# Altium PCB HU_revB.PcbDoc (part 1 of 5)
Units mm, origin at the board's own origin, x right, y up, seen from the top; angles counter-clockwise.
Board outline 164 x 90 mm, 6 copper layers (TOP, GND1, INT SIG, PWR + INT SIG, GND2, BOT), stack 1.538 mm thick; 404 components, 380 nets, 1687 pads, 328 vias.
Unrouted connection lines stored in the file: 342.
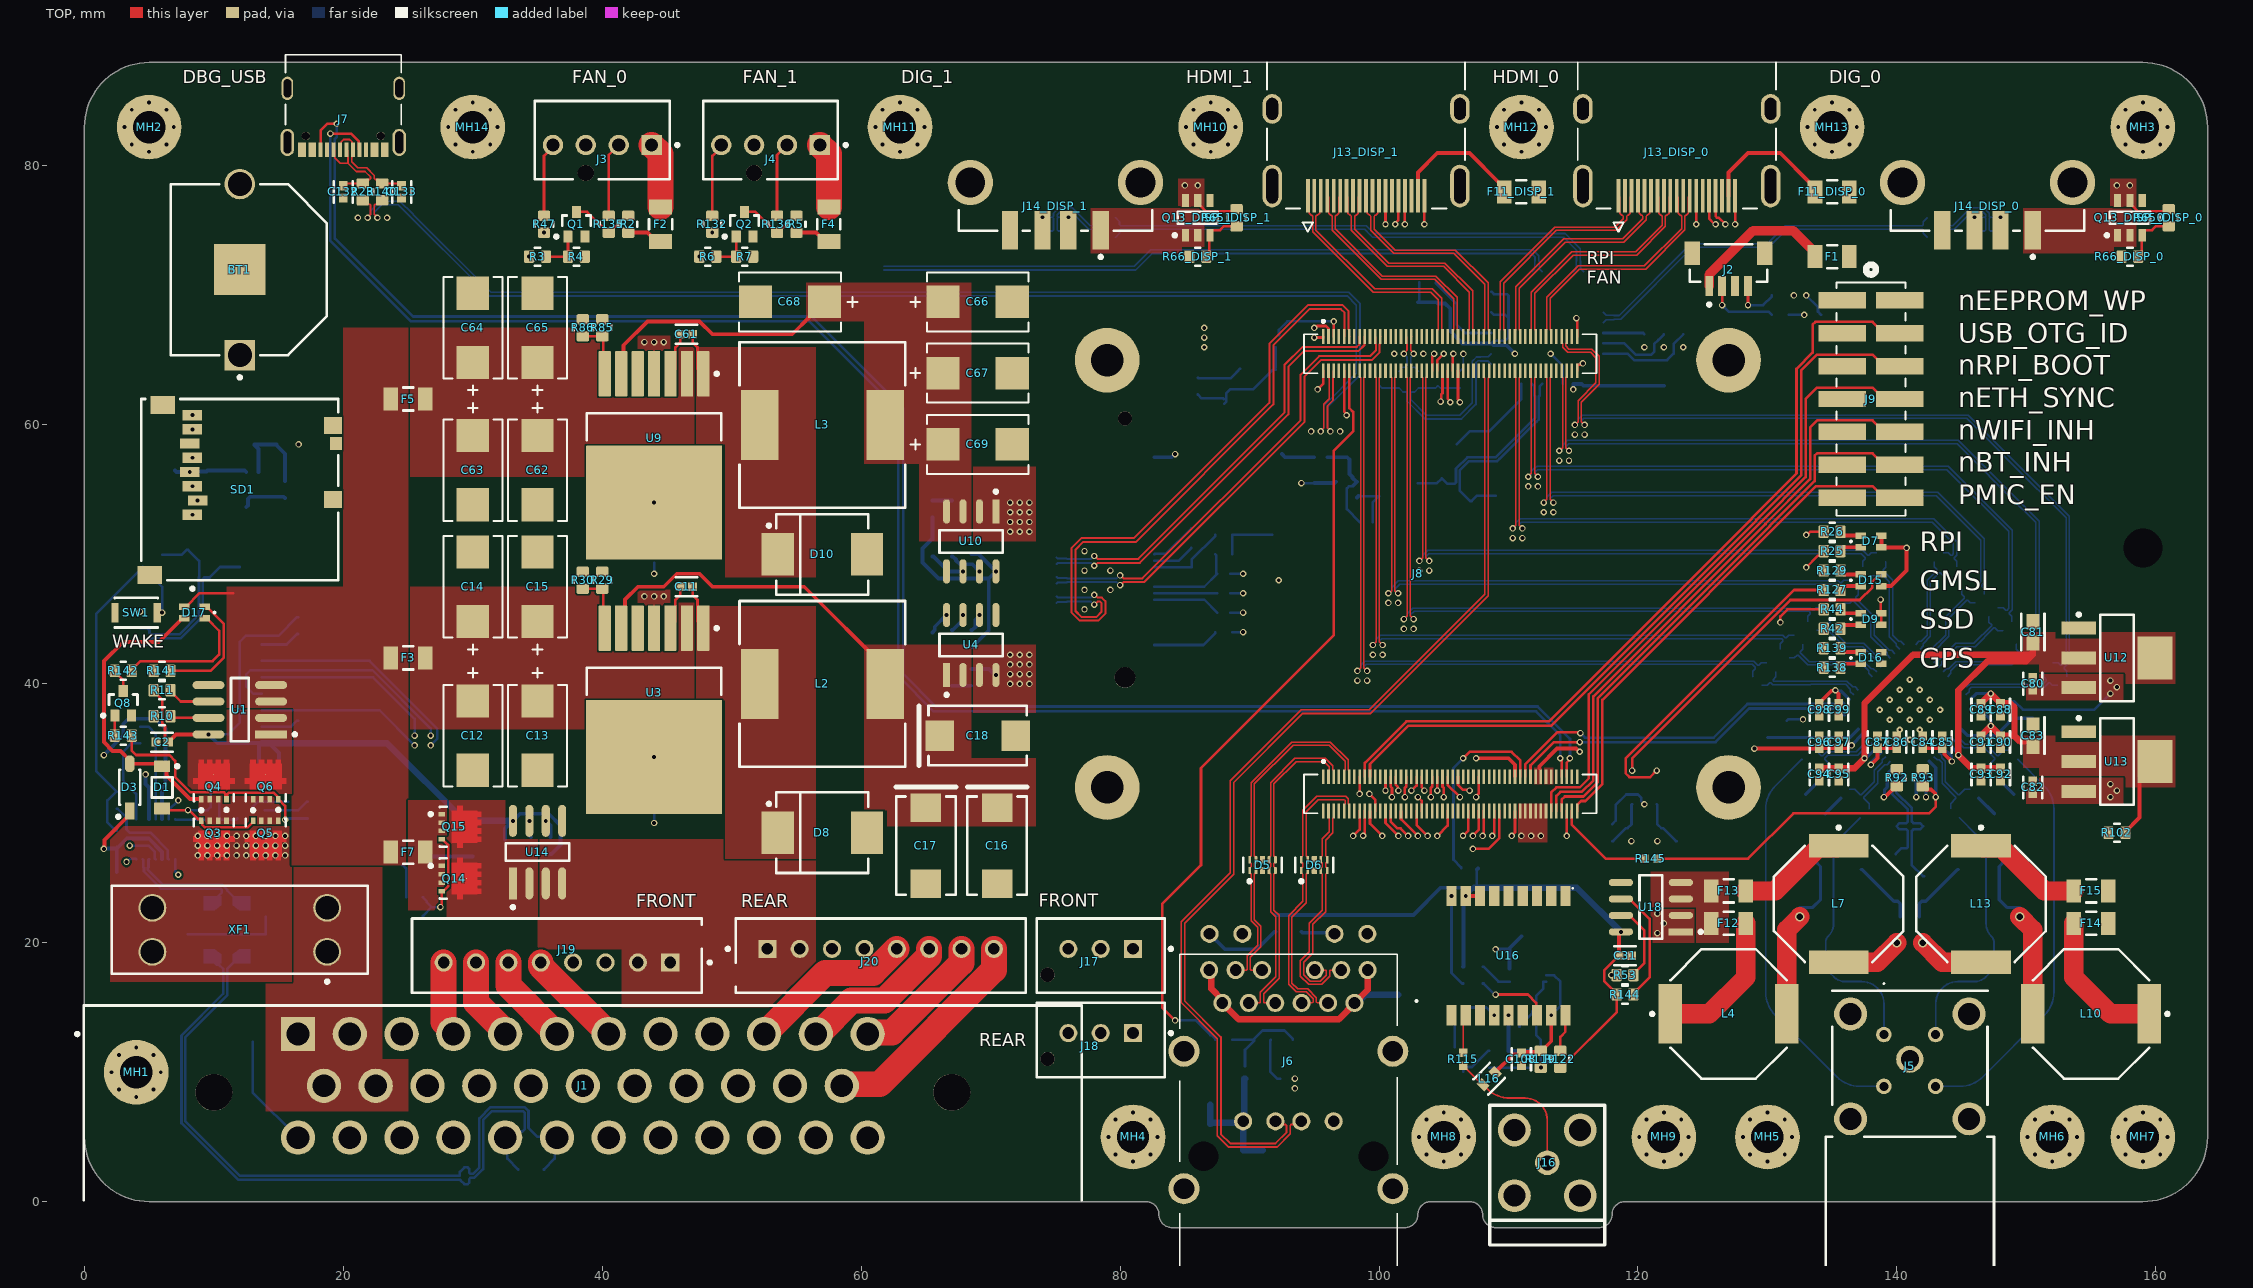
[diagram p0: TOP view]
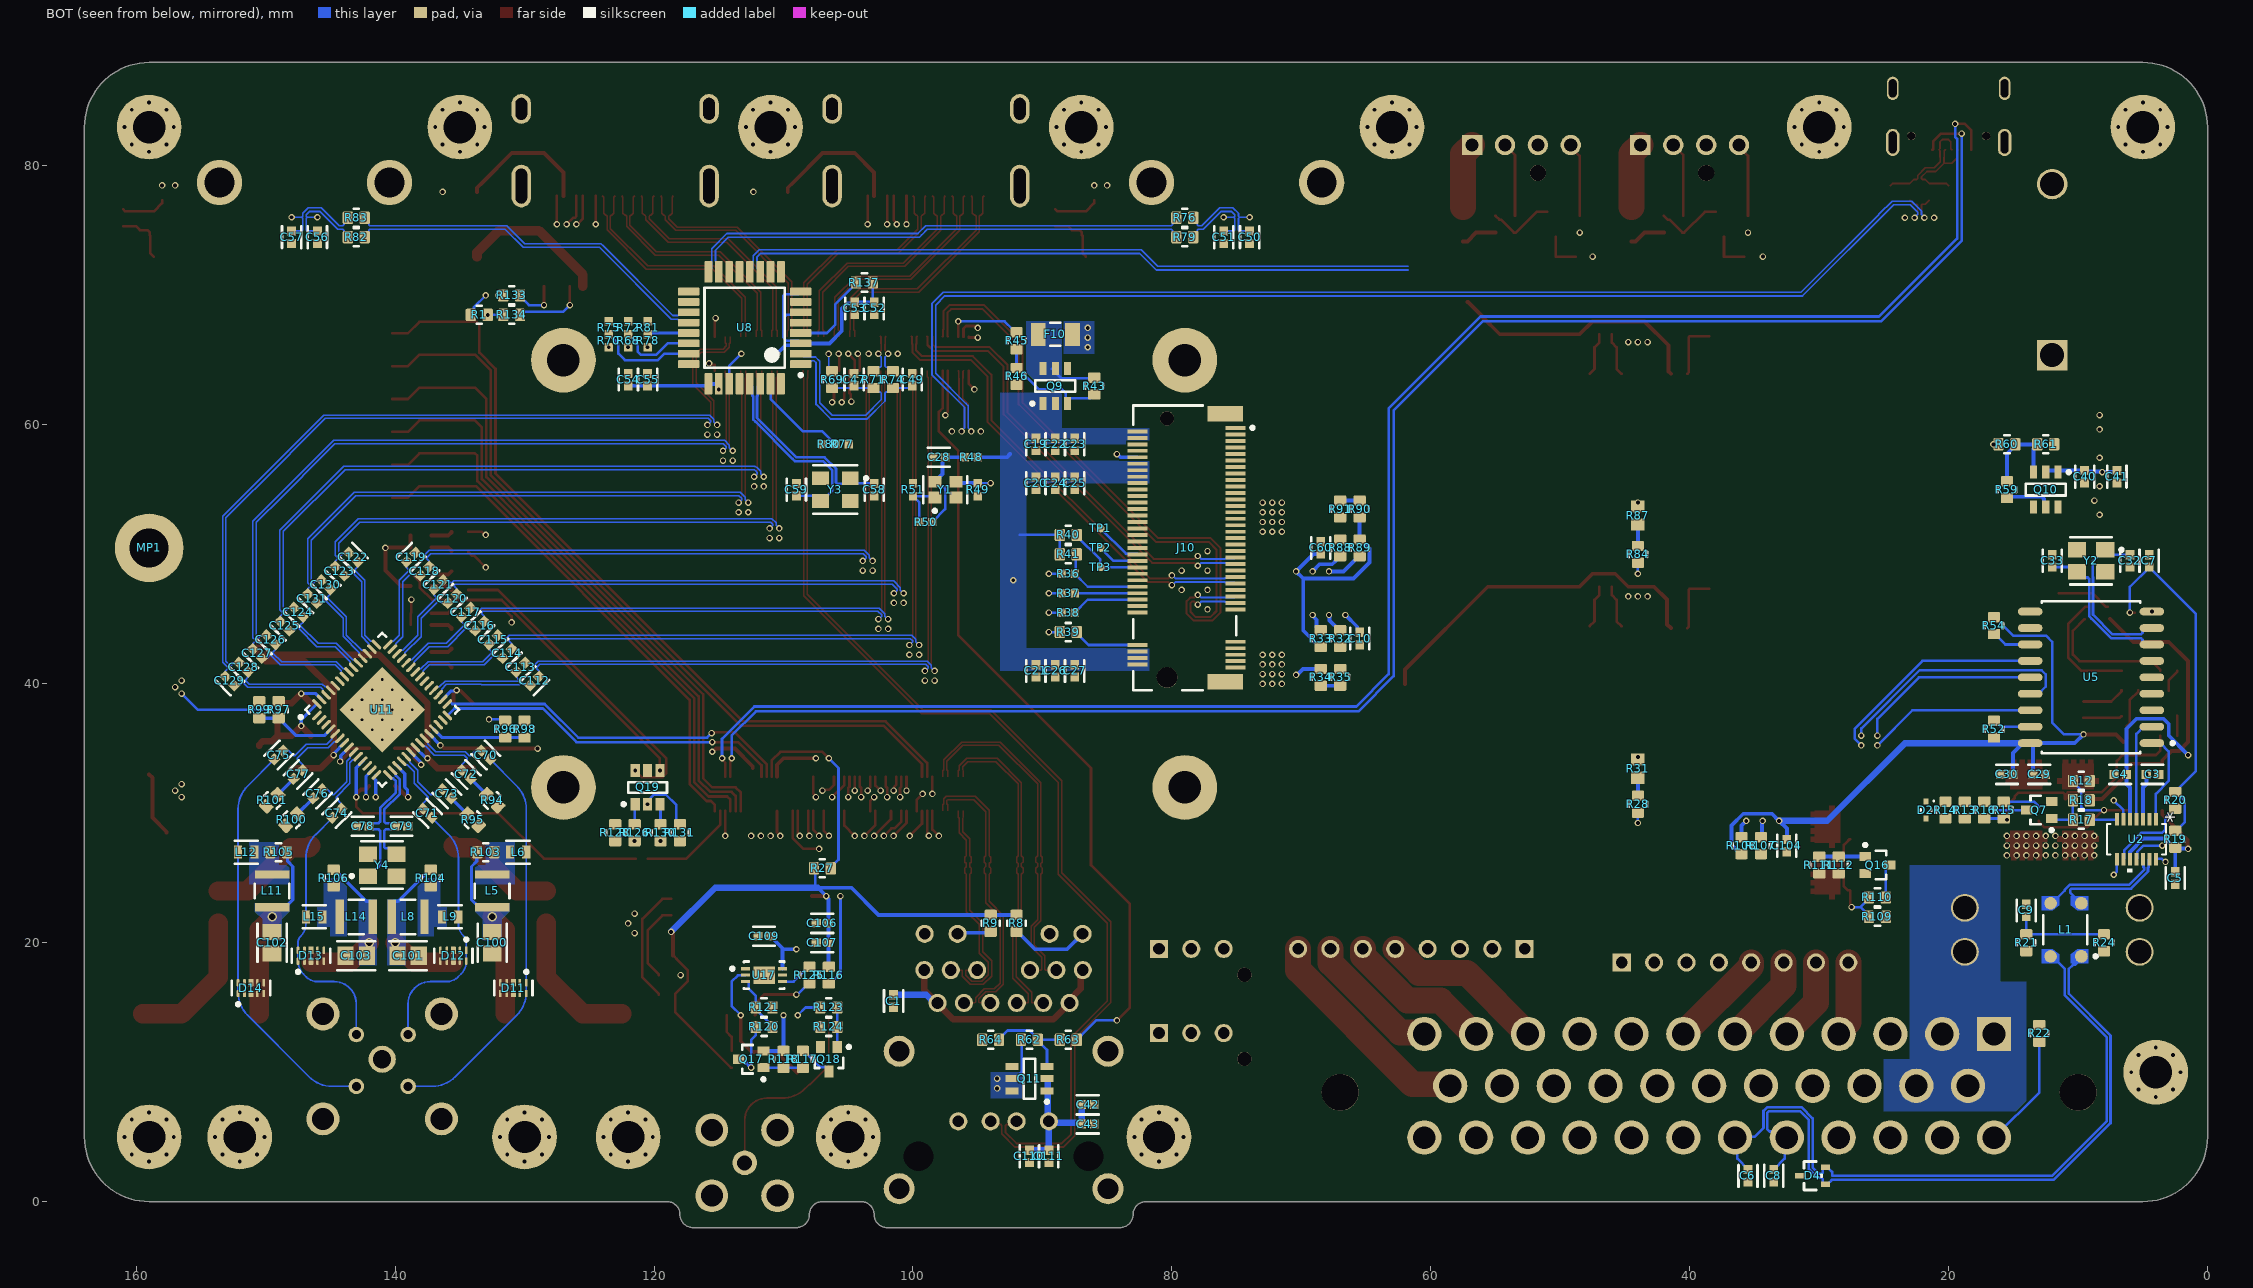
[diagram p1: BOT view, seen from below]
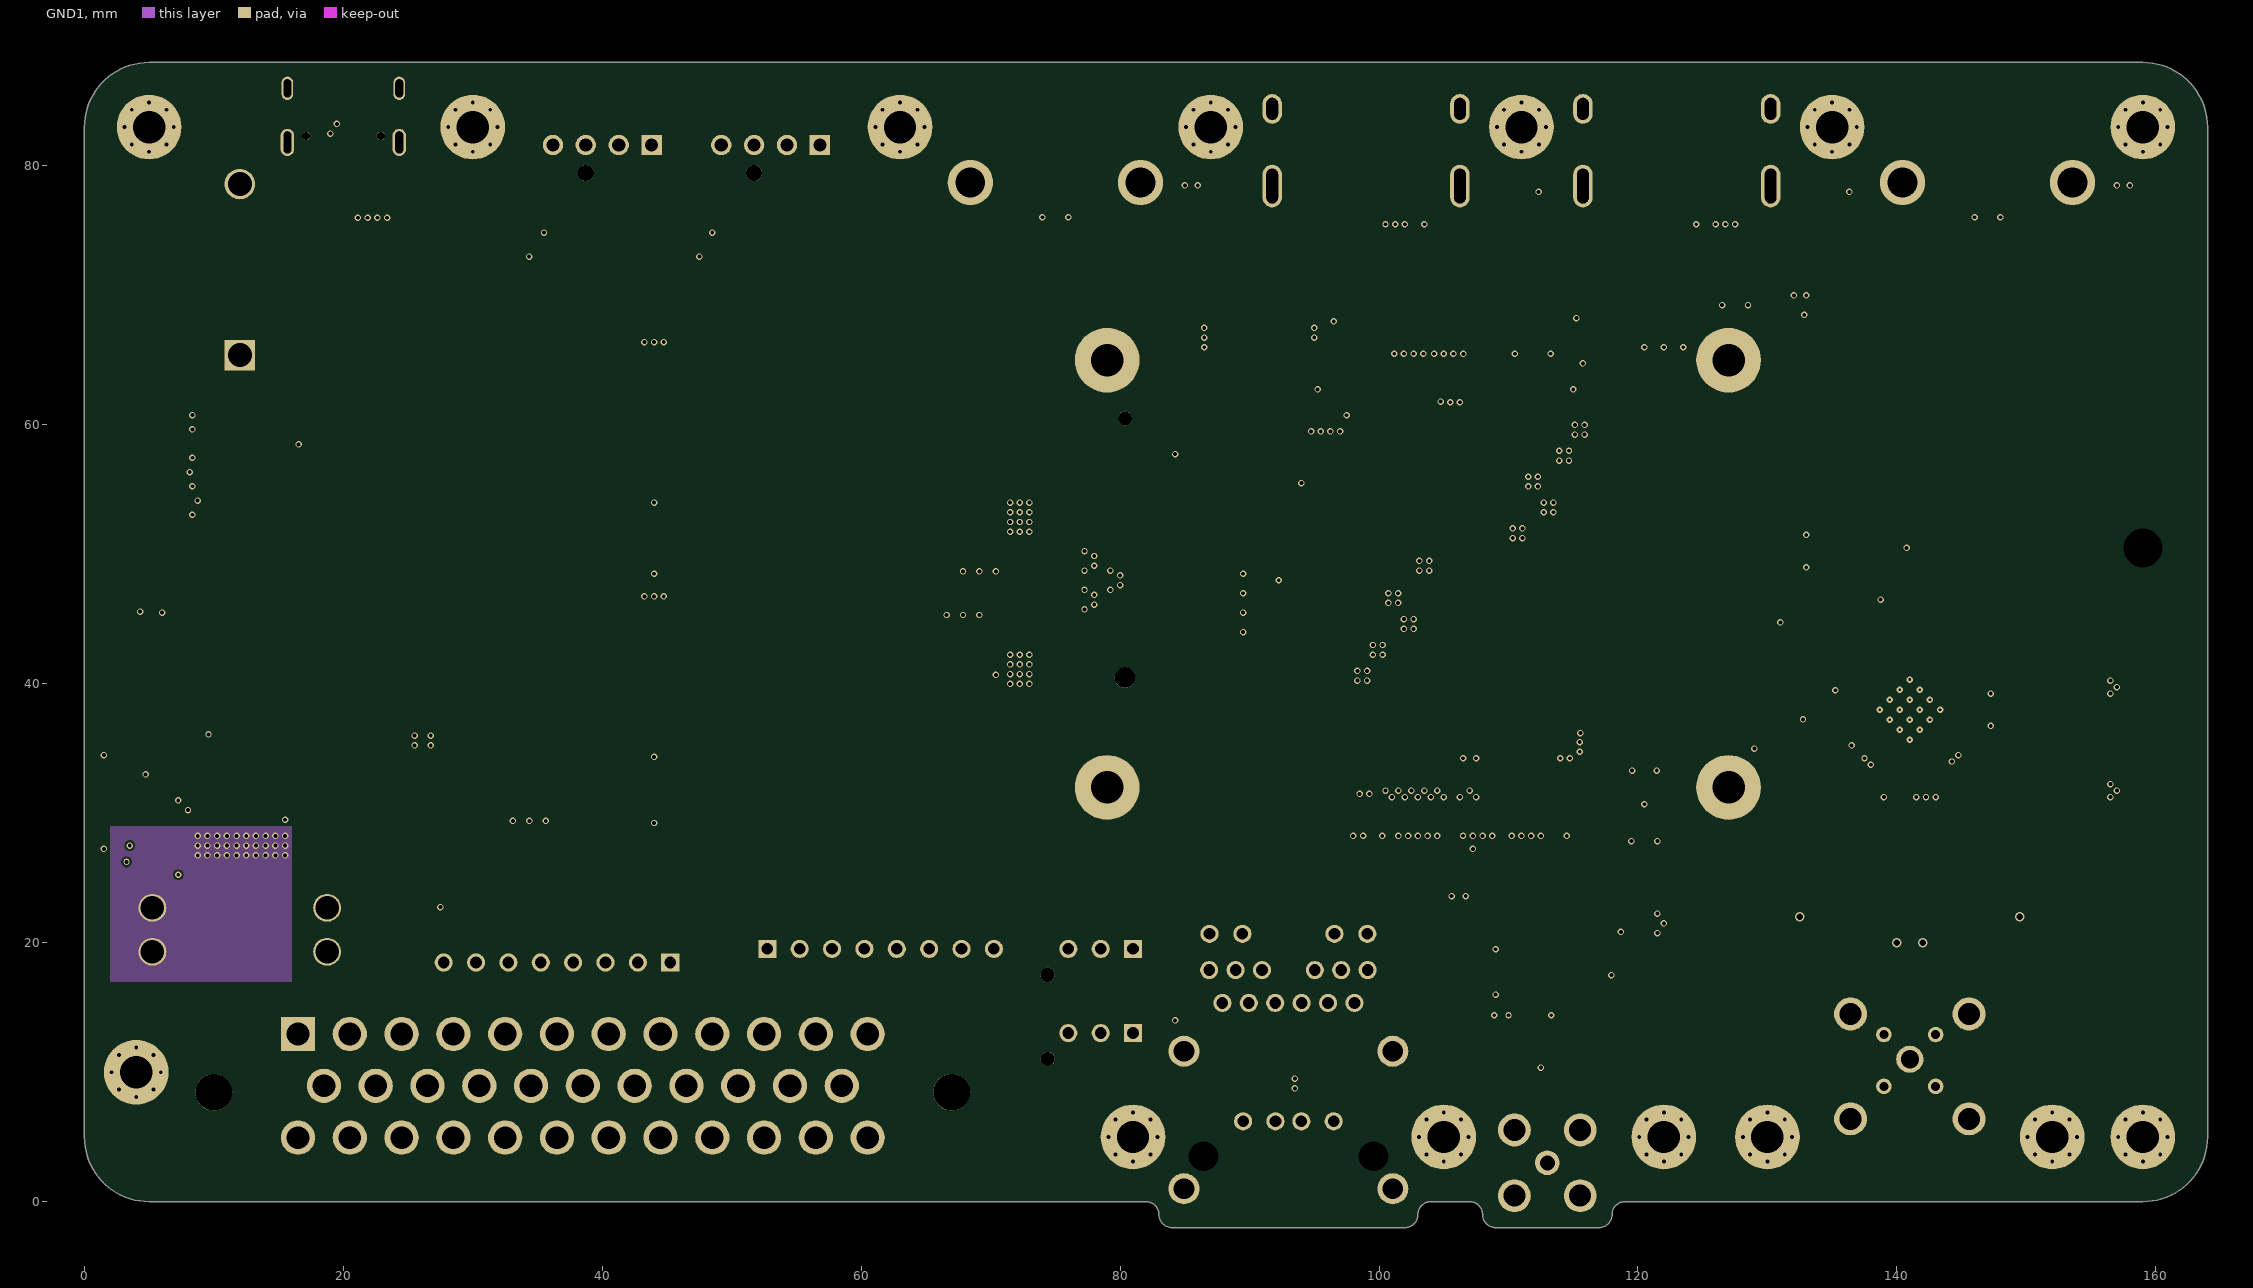
[diagram p2: GND1]
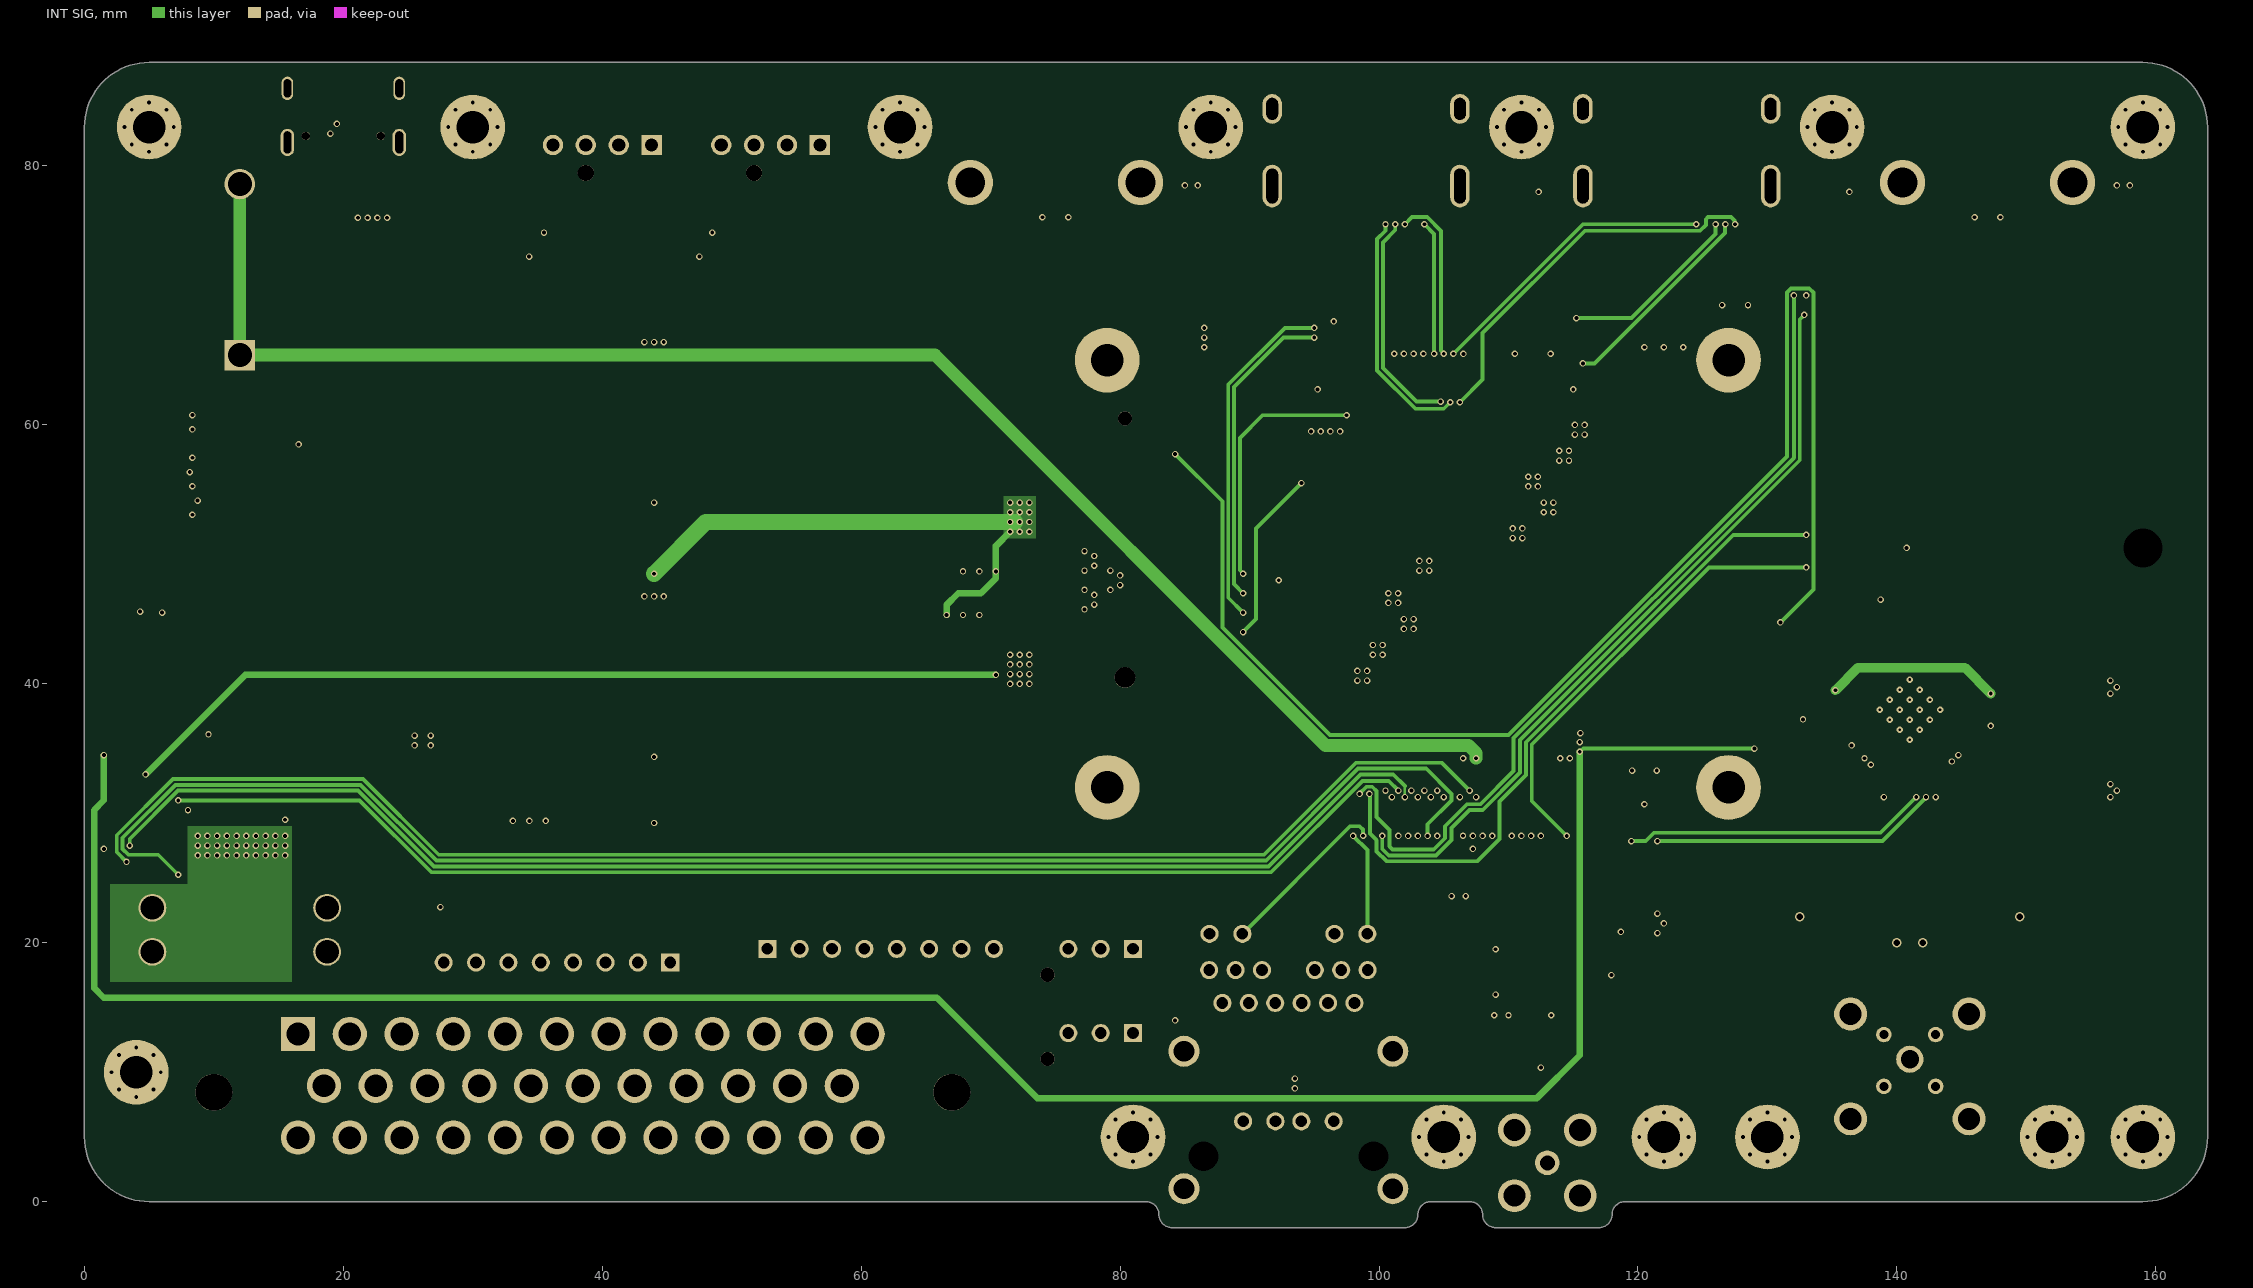
[diagram p3: INT SIG]
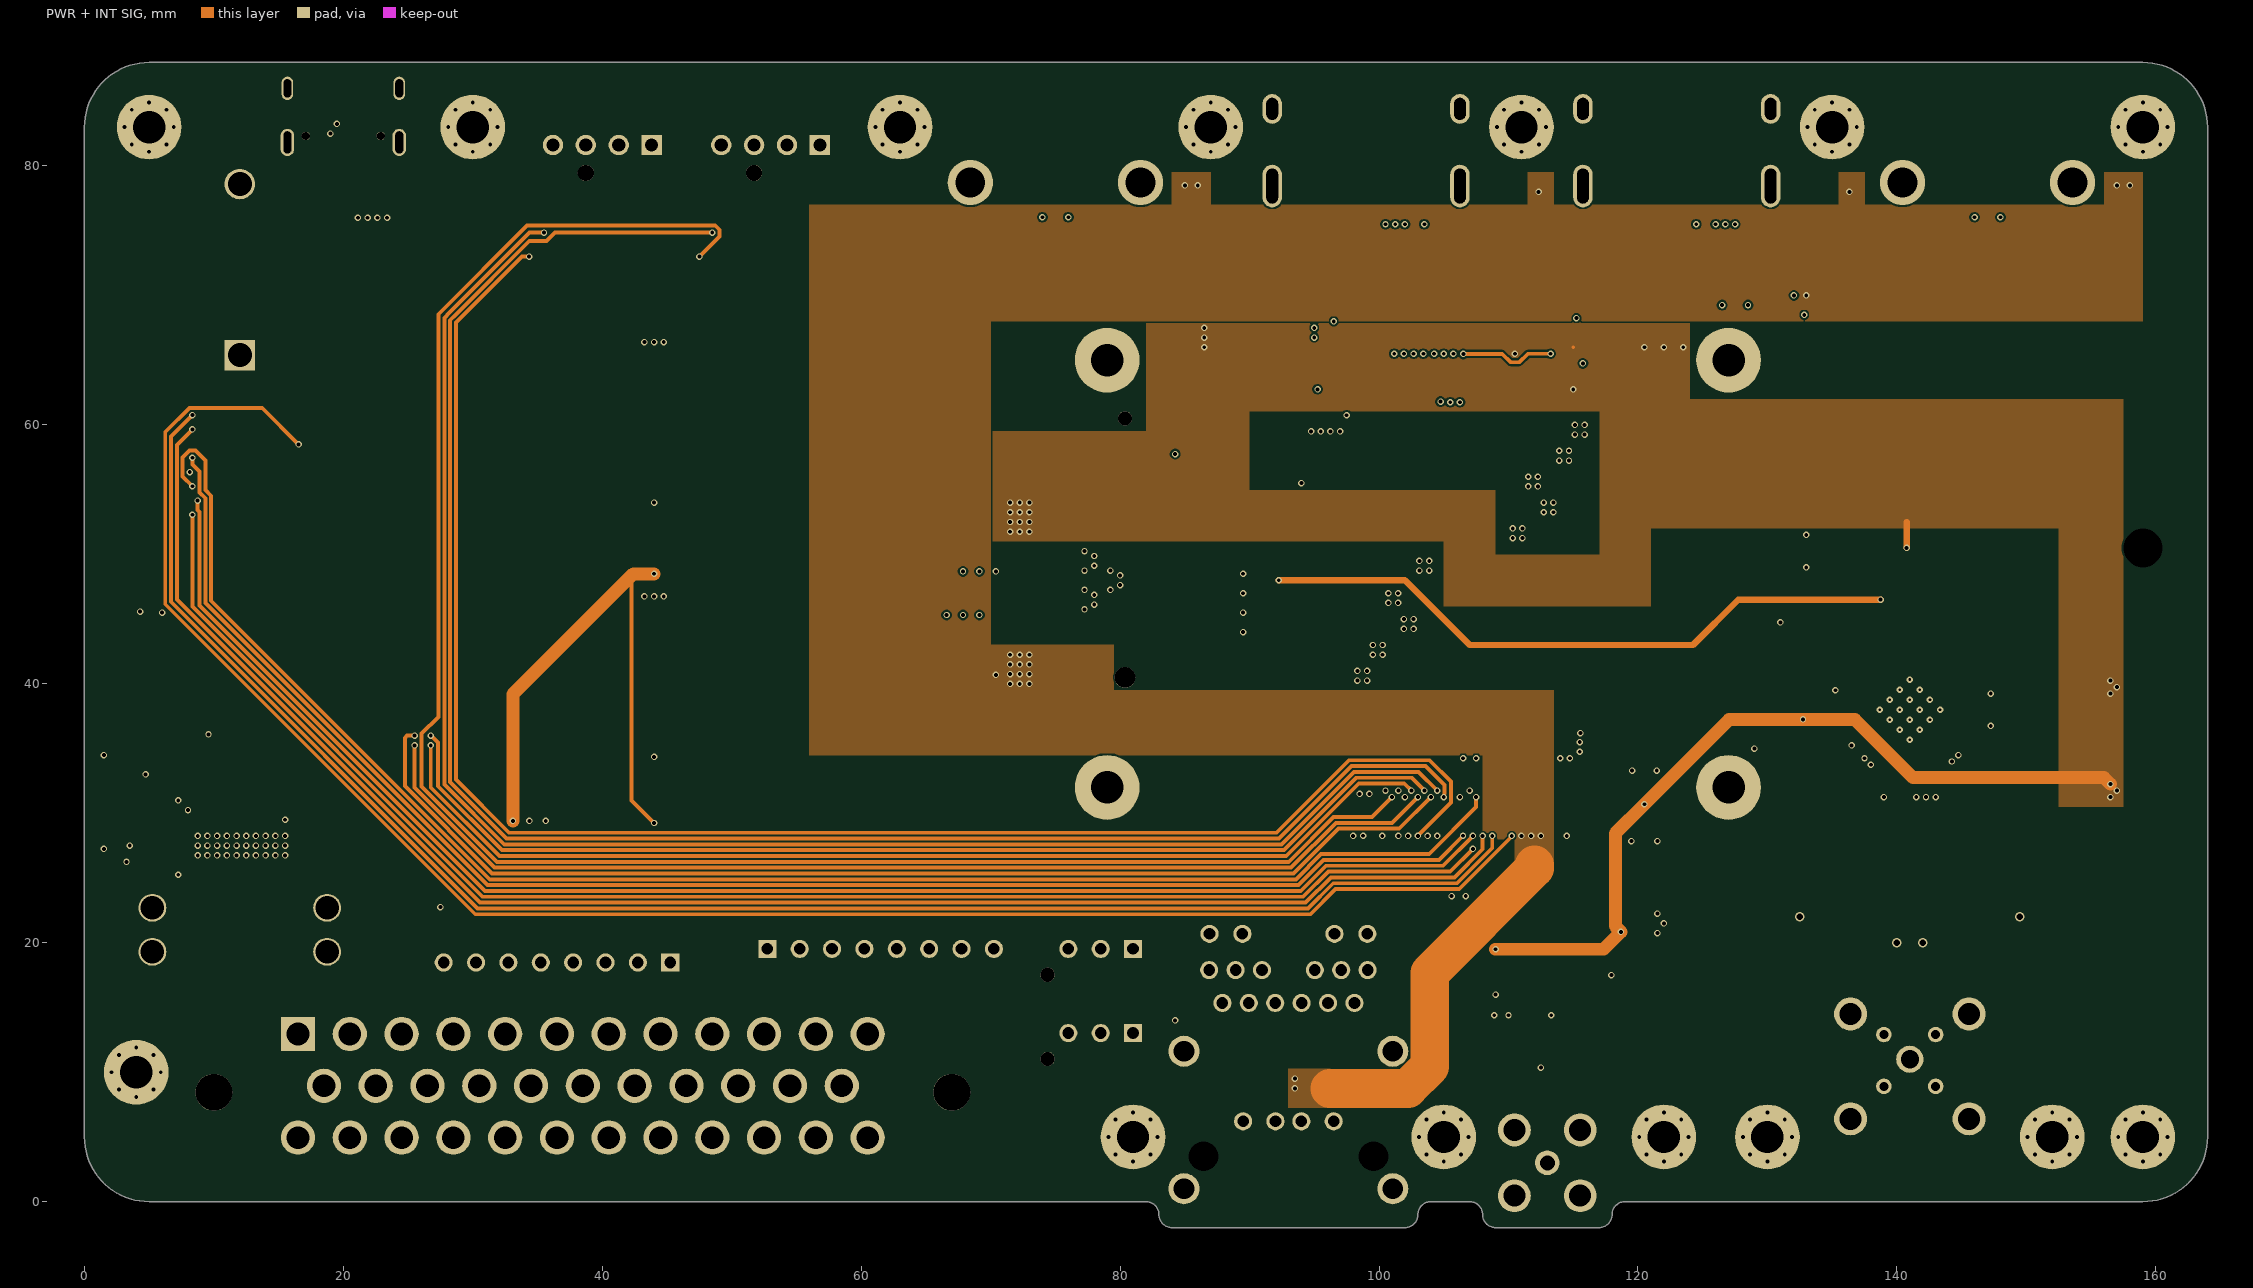
[diagram p4: PWR + INT SIG]
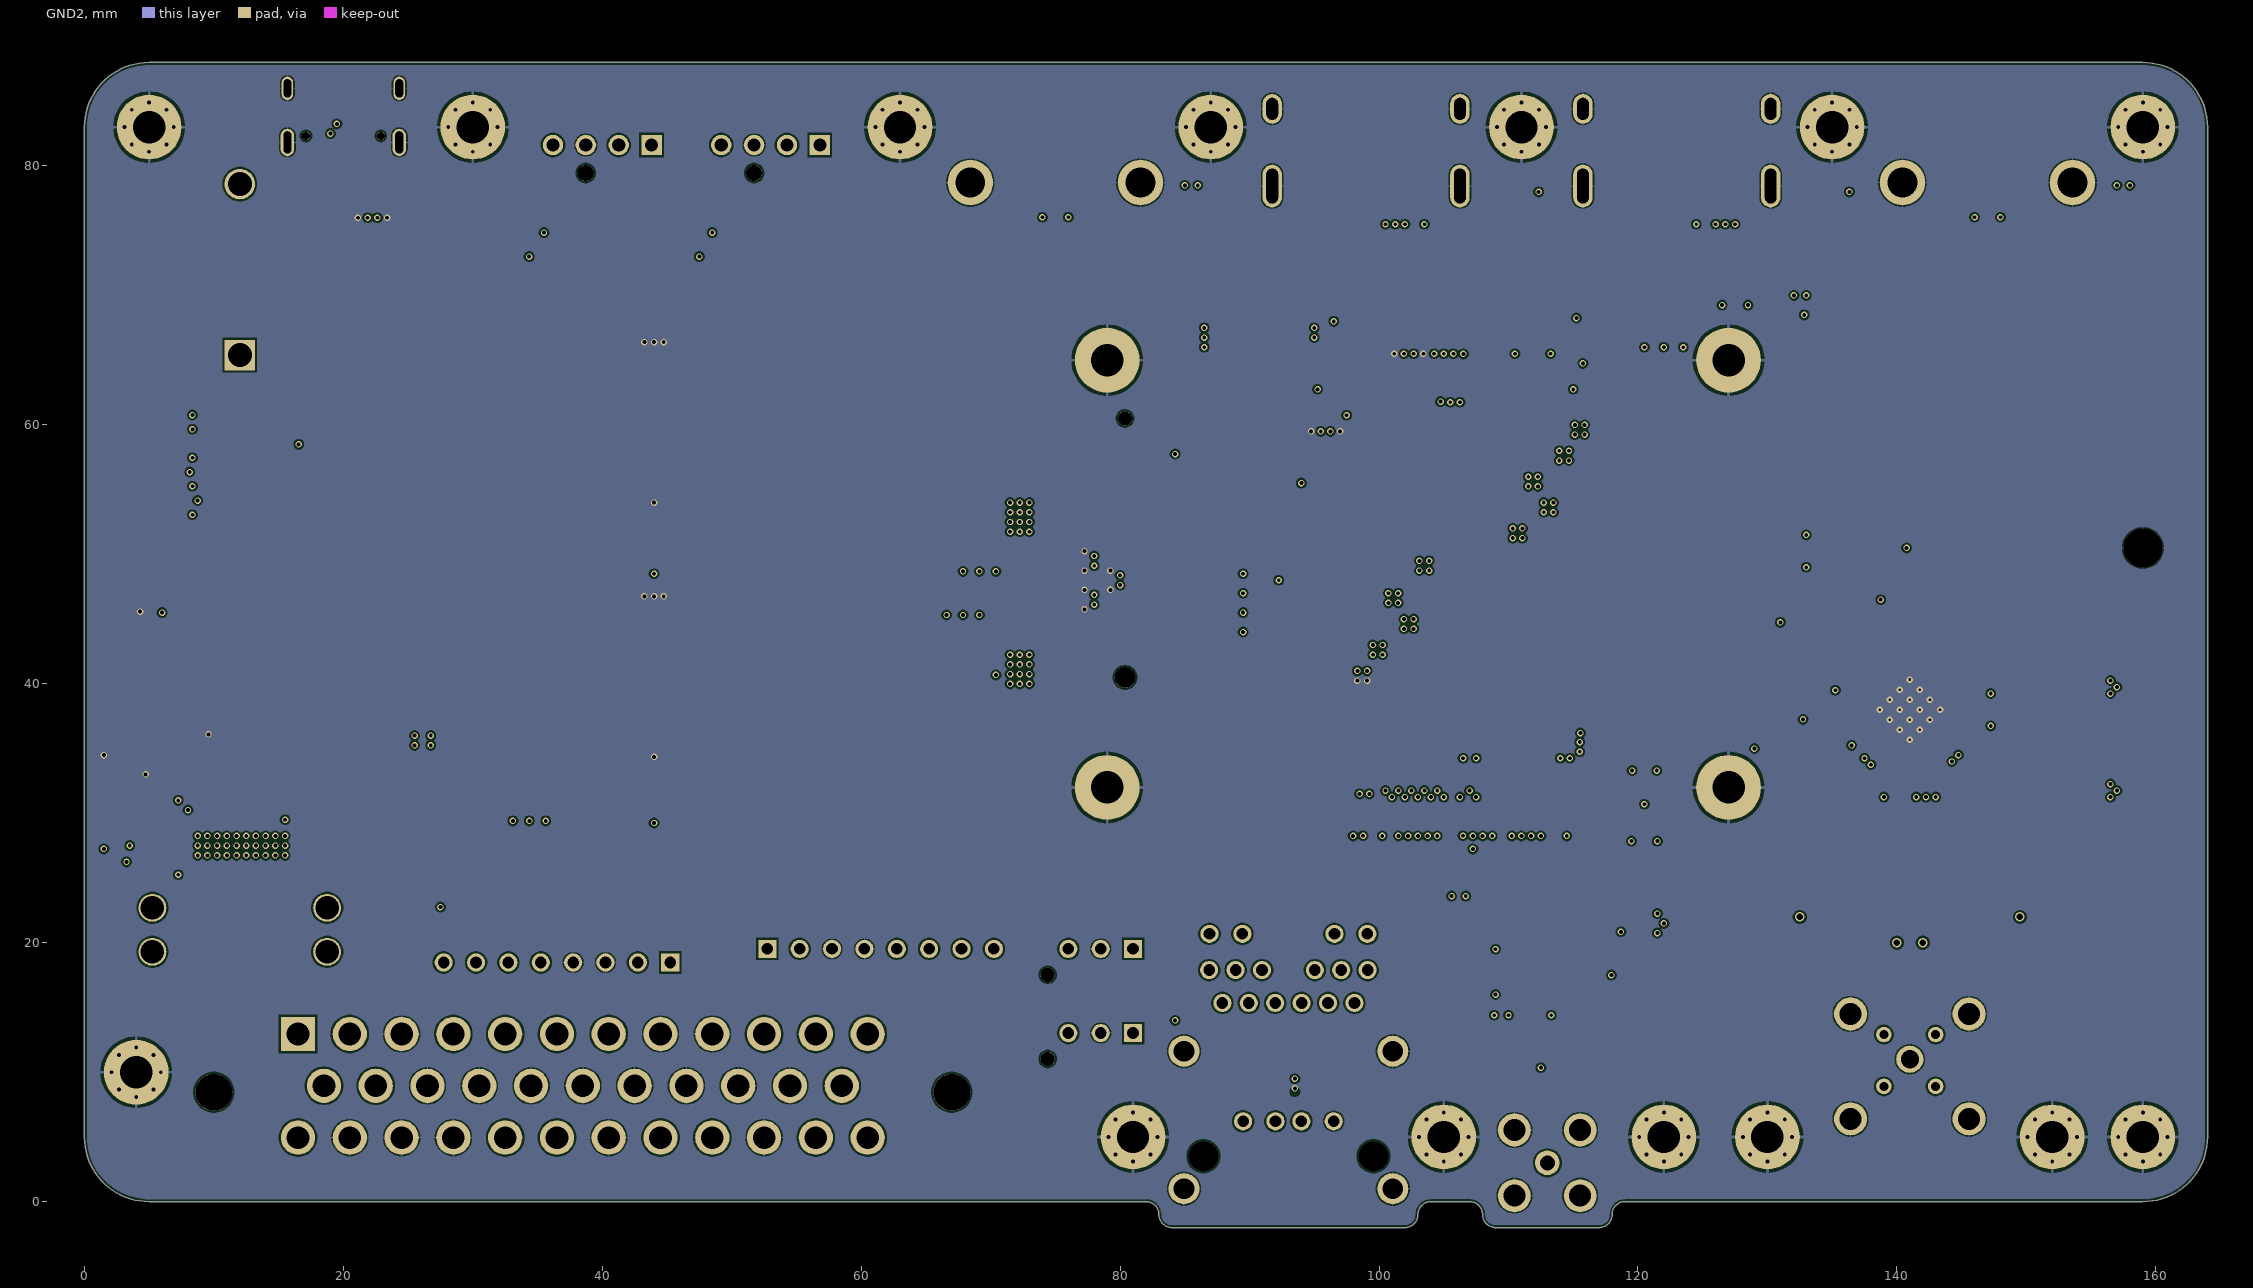
[diagram p5: GND2]

## Layer stack, top to bottom
Top Solder: solder mask 0.0127, Solder Resist, Dk 3.8
TOP: signal copper 0.035
Dielectric 1: prepreg 0.0994, 2313, Dk 4.05
GND1: signal copper 0.0152
Core 1: core 0.55, FR-4, Dk 4.5
INT SIG: signal copper 0.0152
Dielectric 2: prepreg 0.1088, 2116, Dk 4.25
PWR + INT SIG: signal copper 0.0152
Core 2: core 0.55, FR-4, Dk 4.5
GND2: signal copper 0.0152
Dielectric 3: prepreg 0.0994, 2313, Dk 4.05
BOT: signal copper 0.035
Bottom Solder: solder mask 0.0127, Solder Resist, Dk 3.8

## Board outline
83,-1 ccw(c84,-1) 84,-2 102,-2 ccw(c102,-1) 103,-1 cw(c104,-1) 104,0 107,0 cw(c107,-1) 108,-1 ccw(c109,-1) 109,-2 117,-2 ccw(c117,-1) 118,-1 cw(c119,-1) 119,0 159,0 ccw(c159,5) 164,5 164,83 ccw(c159,83) 159,88 5,88 ccw(c5,83) 0,83 0,5 ccw(c5,5) 5,0 82,0 cw(c82,-1)

## Design rules (kind name [scope] priority, off if disabled: settings)
BoardOutlineClearance [All] p1: gap=0.2 ignorepadtopadclearanceinfootprint=FALSE
Clearance [All] p1: gap=0.15 ignorepadtopadclearanceinfootprint=FALSE
ComponentClearance [All] p1: gap=0.102 collisioncheckmode=3 verticalgap=0.102 showdistances=TRUE
DiffPairsRouting 90DIFF [InDifferentialPairClass('90DIFF')] p1: maxlimit=0.15 minlimit=0.127 mostfreqgap=0.127 toplayer_mingap=0.15 toplayer_prefgap=0.15 toplayer_minwidth=0.135 toplayer_maxwidth=0.135 toplayer_prefwidth=0.135 midlayer1_maxgap=0.127 midlayer1_minwidth=0.104 midlayer1_maxwidth=0.104 midlayer1_prefwidth=0.104 midlayer2_maxgap=0.127 midlayer2_minwidth=0.105 midlayer2_maxwidth=0.105 midlayer2_prefwidth=0.105 midlayer3_maxgap=0.127 midlayer3_minwidth=0.105 midlayer3_maxwidth=0.105 midlayer3_prefwidth=0.105 midlayer4_maxgap=0.127 midlayer4_minwidth=0.104 midlayer4_maxwidth=0.104 midlayer4_prefwidth=0.104 bottomlayer_mingap=0.15 bottomlayer_prefgap=0.15 bottomlayer_minwidth=0.135 bottomlayer_maxwidth=0.135 bottomlayer_prefwidth=0.135 impedanceprofiledriven=TRUE impedanceprofileid={E2B21E95-53F9-44AF-B5D0-3A7C9C726F64} impedanceprofilevalue=90.000000 maxuncoupledlength=12.7
DiffPairsRouting 100DIFF [InDifferentialPairClass('100DIFF')] p2: maxlimit=0.15 minlimit=0.127 mostfreqgap=0.127 toplayer_mingap=0.15 toplayer_prefgap=0.15 toplayer_minwidth=0.103 toplayer_maxwidth=0.103 toplayer_prefwidth=0.103 midlayer1_maxgap=0.127 midlayer1_minwidth=0.078 midlayer1_maxwidth=0.078 midlayer1_prefwidth=0.078 midlayer2_maxgap=0.127 midlayer2_minwidth=0.078 midlayer2_maxwidth=0.078 midlayer2_prefwidth=0.078 midlayer3_maxgap=0.127 midlayer3_minwidth=0.078 midlayer3_maxwidth=0.078 midlayer3_prefwidth=0.078 midlayer4_maxgap=0.127 midlayer4_minwidth=0.078 midlayer4_maxwidth=0.078 midlayer4_prefwidth=0.078 bottomlayer_mingap=0.15 bottomlayer_prefgap=0.15 bottomlayer_minwidth=0.103 bottomlayer_maxwidth=0.103 bottomlayer_prefwidth=0.103 impedanceprofiledriven=TRUE impedanceprofileid={962579BC-4960-4778-917B-489940ABD6E9} impedanceprofilevalue=100.000000 maxuncoupledlength=12.7
DiffPairsRouting 85DIFF [InDifferentialPairClass('85DIFF')] p3: maxlimit=0.15 minlimit=0.127 mostfreqgap=0.127 toplayer_mingap=0.15 toplayer_prefgap=0.15 toplayer_minwidth=0.155 toplayer_maxwidth=0.155 toplayer_prefwidth=0.155 midlayer1_maxgap=0.127 midlayer1_minwidth=0.12 midlayer1_maxwidth=0.12 midlayer1_prefwidth=0.12 midlayer2_maxgap=0.127 midlayer2_minwidth=0.122 midlayer2_maxwidth=0.122 midlayer2_prefwidth=0.122 midlayer3_maxgap=0.127 midlayer3_minwidth=0.122 midlayer3_maxwidth=0.122 midlayer3_prefwidth=0.122 midlayer4_maxgap=0.127 midlayer4_minwidth=0.12 midlayer4_maxwidth=0.12 midlayer4_prefwidth=0.12 bottomlayer_mingap=0.15 bottomlayer_prefgap=0.15 bottomlayer_minwidth=0.155 bottomlayer_maxwidth=0.155 bottomlayer_prefwidth=0.155 impedanceprofiledriven=TRUE impedanceprofileid={82FFC63F-85D4-47E5-9326-8123E87CC175} impedanceprofilevalue=85.000000 maxuncoupledlength=12.7
DiffPairsRouting [All] p4: maxlimit=0.102 minlimit=0.102 mostfreqgap=0.102 toplayer_minwidth=0.102 toplayer_maxwidth=1816.048 toplayer_prefwidth=0.102 midlayer1_minwidth=0.102 midlayer1_maxwidth=1816.048 midlayer1_prefwidth=0.102 midlayer2_minwidth=0.102 midlayer2_maxwidth=1816.048 midlayer2_prefwidth=0.102 midlayer3_minwidth=0.102 midlayer3_maxwidth=1816.048 midlayer3_prefwidth=0.102 midlayer4_minwidth=0.102 midlayer4_maxwidth=1816.048 midlayer4_prefwidth=0.102 bottomlayer_minwidth=0.102 bottomlayer_maxwidth=1816.048 bottomlayer_prefwidth=0.102 maxuncoupledlength=12.7
Height [All] p1: minheight=0 maxheight=1816.048 prefheight=12.7
HoleSize [All] p1: absolutevalues=TRUE maxlimit=6.3 minlimit=0.2 maxpercent=80.000 minpercent=20.000
HoleToHoleClearance [All] p1: gap=0.25 allowstackedmicrovias=FALSE
MinimumAnnularRing [All] p1: minimumring=0.076
MinimumSolderMaskSliver [All] p1: minsoldermaskwidth=0
PlaneClearance [All] p1: clearance=0.102
PlaneConnect PlaneConnectPowerPads [InPadClass('PowerPads')] p1: planeconnectstyle=Direct reliefexpansion=0.508 reliefentries=4 reliefconductorwidth=0.254 reliefairgap=0.254
PlaneConnect [All] p2: pad.planeconnectstyle=Relief pad.reliefexpansion=0.3 pad.reliefentries=4 pad.reliefconductorwidth=0.102 pad.reliefairgap=0.102 via.planeconnectstyle=Direct via.reliefexpansion=0.3 via.reliefentries=4 via.reliefconductorwidth=0.127 via.reliefairgap=0.127
PolygonConnect PolygonConnectPowerPads [InNetClass('PWR')] p1: connectstyle=Direct reliefconductorwidth=0.254 reliefentries=4 polygonreliefangle="90 Angle" airgapwidth=0.254
PolygonConnect [All] p2: thpad.connectstyle=Relief thpad.reliefconductorwidth=0.102 thpad.reliefentries=4 thpad.polygonreliefangle="90 Angle" thpad.airgapwidth=0.102 smdpad.connectstyle=Relief smdpad.reliefconductorwidth=0.102 smdpad.reliefentries=4 smdpad.polygonreliefangle="90 Angle" smdpad.airgapwidth=0.102 via.connectstyle=Direct via.reliefconductorwidth=0.102 via.reliefentries=4 via.polygonreliefangle="90 Angle" via.airgapwidth=0.102
RoutingVias [All] p1: holewidth=0.2 width=0.45 viastyle="Through Hole" minholewidth=0.2 minwidth=0.45 maxholewidth=6.3 maxwidth=6.55
SilkToSilkClearance [All] p1: silktosilkclearance=0
SilkToSolderMaskClearance [IsPad] p1: minsilkscreentomaskgap=0.102 clearancetoexposedcopper=TRUE
SolderMaskExpansion [All] p1: expansion=0.075 istentingtop=FALSE
SupplyNets "Schematic Supply Nets_12" [InNet('5V_MAIN')] p1: voltage=0.000
SupplyNets "Schematic Supply Nets_11" [InNet('BAT_12V')] p2: voltage=0.000
SupplyNets "Schematic Supply Nets_10" [InNet('RPI_1V8')] p3: voltage=0.000
SupplyNets "Schematic Supply Nets_9" [InNet('3V3_AUX')] p4: voltage=0.000
SupplyNets "Schematic Supply Nets_8" [InNet('GND')] p5: voltage=0.000
SupplyNets "Schematic Supply Nets_7" [InNet('PWR_OUT')] p6: voltage=0.000
SupplyNets "Schematic Supply Nets_5" [InNet('M2_3V3')] p7: voltage=0.000
SupplyNets "Schematic Supply Nets_4" [InNet('3V3_MAIN')] p8: voltage=0.000
SupplyNets "Schematic Supply Nets_3" [InNet('AMP_VCC')] p9: voltage=0.000
SupplyNets "Schematic Supply Nets_2" [InNet('ACC_12V')] p10: voltage=0.000
Width 50SINGLE [InNetClass('50SINGLE')] p1: maxlimit=0.14 minlimit=0.113 preferedwidth=0.117 toplayer_minwidth=0.14 toplayer_prefwidth=0.14 midlayer1_minwidth=0.14 midlayer1_prefwidth=0.14 midlayer2_minwidth=0.117 midlayer2_maxwidth=0.117 midlayer3_minwidth=0.117 midlayer3_maxwidth=0.117 midlayer4_maxwidth=0.113 midlayer4_prefwidth=0.113 bottomlayer_minwidth=0.14 bottomlayer_prefwidth=0.14 impedanceprofiledriven=TRUE impedanceprofileid={206A4850-E925-4E79-8591-AAFCD7CB73F9} impedanceprofilevalue=50.000000 minimp=50.000000 maximp=50.000000 favimp=50.000000
Width [All] p2: maxlimit=1816.048 minlimit=0.102 preferedwidth=0.102
20 further rules are at their usual default settings.

## Classes and differential pairs
differential pair class 90DIFF: D0 D1 D2 D3 DBG_USB DIGI_USB_DISP_0 DIGI_USB_DISP_1 INT_USB PRE_RC_DBG_USB RPI_USB USB2 USB3_0_D USB3_0_RX USB3_0_TX USB3_1_D USB3_1_RX USB3_1_TX
differential pair class 85DIFF: PCIE_CLK PCIE_RX0 PCIE_TX0
component class 3V3_0: C60 C61 C62 C63 C64 C65 C66 C67 C68 C69 D10 L3 R84 R85 R86 R87 R88 R89 R90 R91 U9 U10
component class GPS_0: C106 C107 C108 C109 D16 J16 L16 Q17 Q18 R115 R116 R117 R118 R119 R120 R121 R122 R123 R124 R125 R138 R139 TP4 U16 U17
component class ADC_0: C34 C35 C36 C37 C38 C39 R55 R56 R57 R58 U6 U7
component class NVME_0: C19 C20 C21 C22 C23 C24 C25 C26 C27 C28 D9 F10 J10 MP1 Q9 R36 R37 R38 R39 R40 R41 R42 R43 R44 R45 R46 R48 R49 R50 R51 TP1 TP2 TP3 Y1
component class USB2_HUB_0: C46 C47 C48 C49 C50 C51 C52 C53 C54 C55 C56 C57 C58 C59 R67 R68 R69 R70 R71 R72 R73 R74 R75 R76 R77 R78 R79 R80 R81 R82 R83 R137 U8 Y3
component class MCP2515: C29 C30 C32 C33 R52 R54 U5 Y2
component class SD: C40 C41 Q10 R59 R60 R61 SD1
differential pair class 100DIFF: CKA CKB CKC DA0 DA1 DA2 DA3 DB0 DB1 DB2 DB3 DPHY0_CK DPHY0_D0 DPHY0_D1 DPHY0_D2 DPHY0_D3 DPHY1_CK DPHY1_D0 DPHY1_D1 DPHY1_D2 DPHY1_D3 HDMI0_CK HDMI0_D0 HDMI0_D1 HDMI0_D2 HDMI1_CK HDMI1_D0 HDMI1_D1 HDMI1_D2 SIOA SIOB SIOC SIOD TRD0 TRD1 TRD2 TRD3
channel class HDMI: DISP_0 DISP_1
net class PWR: 3V3_AUX 3V3_MAIN 3V3_REG_FB 5V_MAIN 5V_REG_FB AMP_VCC BAT_12V DES_1V2 DES_1V8 DISP_5V_DISP_0 DISP_5V_DISP_1 M2_3V3 NetC11_2 NetC12_1 NetC61_2 NetC62_1 NetC100_1 NetC101_1 NetC102_1 NetC103_1 NetF1_1 NetF2_1 NetF4_1 NetF7_2 NetF10_2 NetF12_2 NetF13_2 NetF14_2 NetF15_2 NetL5_2 NetL8_2 NetL11_2 NetL14_2 NetQ3_5-6-7-8 NetQ14_5-6-7-8 PoC_PWR PRE_PoC_PWR PRE_SHUNT PRE_VCC PWR_OUT RPI_1V8
net class 50SINGLE: NetC72_2 NetC73_2 NetC76_2 NetC77_2 NetJ16_1 PoC_A PoC_B PoC_C PoC_D RF_IN
component class 5V_0: C10 C11 C12 C13 C14 C15 C16 C17 C18 D8 L2 R28 R29 R30 R31 R32 R33 R34 R35 U3 U4
component class PWR_SW_0: C104 Q14 Q15 Q16 R107 R108 R109 R110 R111 R112 U14
component class RPI_0: BT1 D5 D6 D7 J8 J9 R25 R26 R27
component class PWR_MGMT: C2 C3 C4 C5 C6 C7 C8 C9 D1 D2 D3 D4 D17 L1 Q3 Q4 Q5 Q6 Q7 Q8 R10 R11 R12 R13 R14 R15 R16 R17 R18 R19 R20 R21 R22 R24 R141 R142 R143 SW1 U1 U2 XF1
component class HU_revB: C1 C42 C43 C110 C111 C132 C133 F1 F2 F3 F4 F5 F6 F7 J1 J2 J3 J4 J5 J6 J7 J17 J18 J19 J20 MH1 MH2 MH3 MH4 MH5 MH6 MH7 MH8 MH9 MH10 MH11 MH12 MH13 MH14 Q1 Q2 Q11 R1 R2 R3 R4 R5 R6 R7 R8 R9 R23 R47 R62 R63 R64 R132 R133 R134 R135 R136 R140 R145
component class GMSL_DESERIALIZER_0: C31 C70 C71 C72 C73 C74 C75 C76 C77 C78 C79 C80 C81 C82 C83 C84 C85 C86 C87 C88 C89 C90 C91 C92 C93 C94 C95 C96 C97 C98 C99 C100 C101 C102 C103 C112 C113 C114 C115 C116 C117 C118 C119 C120 C121 C122 C123 C124 C125 C126 C127 C128 C129 C130 C131 D11 D12 D13 D14 D15 F12 F13 F14 F15 L4 L5 L6 L7 L8 L9 L10 L11 L12 L13 L14 L15 Q19 R53 R92 R93 R94 R95 R96 R97 R98 R99 R100 R101 R102 R103 R104 R105 R106 R126 R127 R128 R129 R130 R131 R144 U11 U12 U13 U18 Y4
component class DISP_1: F11_DISP_1 J13_DISP_1 J14_DISP_1 Q13_DISP_1 R65_DISP_1 R66_DISP_1
component class DISP_0: F11_DISP_0 J13_DISP_0 J14_DISP_0 Q13_DISP_0 R65_DISP_0 R66_DISP_0
differential pair class CAN: CAN PRE_CAN
differential pair PRE_RC_DBG_USB: +PRE_RC_DBG_USB_P -PRE_RC_DBG_USB_N
differential pair DBG_USB: +DBG_USB_P -DBG_USB_N
differential pair DPHY1_D3: +DPHY1_D3_P -DPHY1_D3_N
differential pair DPHY1_D2: +DPHY1_D2_P -DPHY1_D2_N
differential pair DPHY1_D1: +DPHY1_D1_P -DPHY1_D1_N
differential pair DPHY1_D0: +DPHY1_D0_P -DPHY1_D0_N
differential pair DPHY1_CK: +DPHY1_CK_P -DPHY1_CK_N
differential pair DPHY0_D3: +DPHY0_D3_P -DPHY0_D3_N
differential pair DPHY0_D2: +DPHY0_D2_P -DPHY0_D2_N
differential pair DPHY0_D1: +DPHY0_D1_P -DPHY0_D1_N
differential pair DPHY0_D0: +DPHY0_D0_P -DPHY0_D0_N
differential pair DPHY0_CK: +DPHY0_CK_P -DPHY0_CK_N
differential pair USB3_1_TX: +USB3_1_TX_P -USB3_1_TX_N
differential pair USB3_1_RX: +USB3_1_RX_P -USB3_1_RX_N
differential pair USB3_1_D: +USB3_1_D_P -USB3_1_D_N
differential pair USB3_0_TX: +USB3_0_TX_P -USB3_0_TX_N
differential pair USB3_0_RX: +USB3_0_RX_P -USB3_0_RX_N
differential pair USB3_0_D: +USB3_0_D_P -USB3_0_D_N
differential pair TRD3: +TRD3_P -TRD3_N
differential pair TRD2: +TRD2_P -TRD2_N
differential pair TRD1: +TRD1_P -TRD1_N
differential pair TRD0: +TRD0_P -TRD0_N
differential pair HDMI1_D2: +HDMI1_D2_P -HDMI1_D2_N
differential pair HDMI1_D1: +HDMI1_D1_P -HDMI1_D1_N
differential pair HDMI1_D0: +HDMI1_D0_P -HDMI1_D0_N
differential pair HDMI1_CK: +HDMI1_CK_P -HDMI1_CK_N
differential pair HDMI0_D2: +HDMI0_D2_P -HDMI0_D2_N
differential pair HDMI0_D1: +HDMI0_D1_P -HDMI0_D1_N
differential pair HDMI0_D0: +HDMI0_D0_P -HDMI0_D0_N
differential pair HDMI0_CK: +HDMI0_CK_P -HDMI0_CK_N
differential pair PCIE_TX0: +PCIE_TX0_P -PCIE_TX0_N
differential pair PCIE_CLK: +PCIE_CLK_P -PCIE_CLK_N
differential pair X: +X_P -X_N
differential pair X25: +X25_P -X25_N
differential pair TUSB2036_X: +TUSB2036_X_P -TUSB2036_X_N
differential pair SIOD: +SIOD_P -SIOD_N
differential pair SIOC: +SIOC_P -SIOC_N
differential pair SIOB: +SIOB_P -SIOB_N
differential pair SIOA: +SIOA_P -SIOA_N
differential pair PCIE_RX0: +PCIE_RX0_P -PCIE_RX0_N
differential pair DIGI_USB_DISP_1: +DIGI_USB_DISP_1_P -DIGI_USB_DISP_1_N
differential pair DIGI_USB_DISP_0: +DIGI_USB_DISP_0_P -DIGI_USB_DISP_0_N
differential pair DB3: +DB3_P -DB3_N
differential pair DB2: +DB2_P -DB2_N
differential pair DB1: +DB1_P -DB1_N
differential pair DB0: +DB0_P -DB0_N
differential pair DA3: +DA3_P -DA3_N
differential pair DA2: +DA2_P -DA2_N
differential pair DA1: +DA1_P -DA1_N
differential pair DA0: +DA0_P -DA0_N
differential pair D3: +D3_P -D3_N
differential pair D2: +D2_P -D2_N
differential pair D1: +D1_P -D1_N
differential pair D0: +D0_P -D0_N
differential pair CKB: +CKB_P -CKB_N
differential pair CKA: +CKA_P -CKA_N
differential pair PRE_CAN: +PRE_CAN_P -PRE_CAN_N
differential pair CAN: +CAN_P -CAN_N

## Components (designator, comment, footprint, x,y, rotation, side; value= is the part's Value field where it differs from the comment)
BT1 "3001" KSTN-3001_V 12,72 r90 top
C1 "100n" FP-0402-L_1_0_0_05-W_0_5-IPC_A 101.5,15.5 r270 bottom
C2 "100n" FP-0402-L_1_0_0_05-W_0_5-IPC_A 6,35.5 r180 top
C3 "100n" FP-0402-L_1_0_0_05-W_0_5-IPC_A 4.25,33 r180 bottom
C4 "100n" FP-0402-L_1_0_0_05-W_0_5-IPC_A 6.75,33 r0 bottom
C5 "100n" FP-0402-L_1_0_0_05-W_0_5-IPC_A 2.5,25 r270 bottom
C6 "DNP" FP-0402-L_1_0_0_05-W_0_5-IPC_A 35.5,2 r270 bottom
C7 "100n" FP-0402-L_1_0_0_05-W_0_5-IPC_A 4.5,49.5 r90 bottom
C8 "DNP" FP-0402-L_1_0_0_05-W_0_5-IPC_A 33.5,2 r90 bottom
C9 "100n" FP-0402-L_1_0_0_05-W_0_5-IPC_A 14,22.5 r270 bottom
C10 "100n" FP-0402-L_1_0_0_05-W_0_5-IPC_A 65.5,43.5 r270 bottom
C11 "10n" FP-0402-L_1_0_0_05-W_0_5-IPC_A 46.5,47.5 r0 top
C12 "T495D106M035ATE260" T495D106M035ATE260-Footprint-1 30,36 r270 top value=10µF
C13 "T495D106M035ATE260" T495D106M035ATE260-Footprint-1 35,36 r270 top value=10µF
C14 "T495D106M035ATE260" T495D106M035ATE260-Footprint-1 30,47.5 r90 top value=10µF
C15 "T495D106M035ATE260" T495D106M035ATE260-Footprint-1 35,47.5 r90 top value=10µF
C16 "T495D157K010ATE100" KEMT-T495-D_L 70.5,27.5 r270 top
C17 "T495D157K010ATE100" KEMT-T495-D_L 65,27.5 r270 top
C18 "T495D157K010ATE100" KEMT-T495-D_L 69,36 r0 top
C19 "10u" FP-0402-L_1_0_0_05-W_0_5-IPC_A 90.5,58.5 r270 bottom
C20 "10u" FP-0402-L_1_0_0_05-W_0_5-IPC_A 90.5,55.5 r270 bottom
C21 "10u" FP-0402-L_1_0_0_05-W_0_5-IPC_A 90.5,41 r270 bottom
C22 "100n" FP-0402-L_1_0_0_05-W_0_5-IPC_A 89,58.5 r270 bottom
C23 "100n" FP-0402-L_1_0_0_05-W_0_5-IPC_A 87.5,58.5 r270 bottom
C24 "100n" FP-0402-L_1_0_0_05-W_0_5-IPC_A 89,55.5 r270 bottom
C25 "100n" FP-0402-L_1_0_0_05-W_0_5-IPC_A 87.5,55.5 r270 bottom
C26 "100n" FP-0402-L_1_0_0_05-W_0_5-IPC_A 89,41 r270 bottom
C27 "100n" FP-0402-L_1_0_0_05-W_0_5-IPC_A 87.5,41 r270 bottom
C28 "100n" FP-0402-L_1_0_0_05-W_0_5-IPC_A 98,57.5 r0 bottom
C29 "10u" FP-0402-L_1_0_0_05-W_0_5-IPC_A 13,33 r180 bottom
C30 "100n" FP-0402-L_1_0_0_05-W_0_5-IPC_A 15.5,33 r0 bottom
C31 "100n" FP-0402-L_1_0_0_05-W_0_5-IPC_A 119,19 r0 top
C32 "14p" FP-0402-L_1_0_0_05-W_0_5-IPC_A 6,49.5 r270 bottom
C33 "14p" FP-0402-L_1_0_0_05-W_0_5-IPC_A 12,49.5 r90 bottom
C34 "100n" FP-0402-L_1_0_0_05-W_0_5-IPC_A 416,-41 r90 top
C35 "100n" FP-0402-L_1_0_0_05-W_0_5-IPC_A 404,-41 r90 top
C36 "100n" FP-0402-L_1_0_0_05-W_0_5-IPC_A 410,-41 r90 top
C37 "100n" FP-0402-L_1_0_0_05-W_0_5-IPC_A 384,-41 r90 top
C38 "100n" FP-0402-L_1_0_0_05-W_0_5-IPC_A 372,-41 r90 top
C39 "100n" FP-0402-L_1_0_0_05-W_0_5-IPC_A 378,-41 r90 top
C40 "10u" FP-0402-L_1_0_0_05-W_0_5-IPC_A 9.5,56 r270 bottom
C41 "100n" FP-0402-L_1_0_0_05-W_0_5-IPC_A 7,56 r270 bottom
C42 "10u" FP-0402-L_1_0_0_05-W_0_5-IPC_A 86.5,7.5 r180 bottom
C43 "100n" FP-0402-L_1_0_0_05-W_0_5-IPC_A 86.5,6 r180 bottom
C46 "22p" FP-0402-L_1_0_0_05-W_0_5-IPC_A 56.65,92 r270 bottom
C47 "22p" FP-0402-L_1_0_0_05-W_0_5-IPC_A 104.55,63.5 r270 bottom
C48 "22p" FP-0402-L_1_0_0_05-W_0_5-IPC_A 58.65,92 r270 bottom
C49 "22p" FP-0402-L_1_0_0_05-W_0_5-IPC_A 100.05,63.5 r90 bottom
C50 "22p" FP-0402-L_1_0_0_05-W_0_5-IPC_A 74,74.5 r270 bottom
C51 "22p" FP-0402-L_1_0_0_05-W_0_5-IPC_A 76,74.5 r270 bottom
C52 "10u" FP-0402-L_1_0_0_05-W_0_5-IPC_A 103,69 r270 bottom
C53 "100n" FP-0402-L_1_0_0_05-W_0_5-IPC_A 104.5,69 r270 bottom
C54 "10u" FP-0402-L_1_0_0_05-W_0_5-IPC_A 122,63.5 r90 bottom
C55 "100n" FP-0402-L_1_0_0_05-W_0_5-IPC_A 120.5,63.5 r90 bottom
C56 "22p" FP-0402-L_1_0_0_05-W_0_5-IPC_A 146,74.5 r270 bottom
C57 "22p" FP-0402-L_1_0_0_05-W_0_5-IPC_A 148,74.5 r270 bottom
C58 "30p" FP-0402-L_1_0_0_05-W_0_5-IPC_A 103,55 r270 bottom
C59 "30p" FP-0402-L_1_0_0_05-W_0_5-IPC_A 109,55 r90 bottom
C60 "100n" FP-0402-L_1_0_0_05-W_0_5-IPC_A 68.5,50.5 r90 bottom
C61 "10n" FP-0402-L_1_0_0_05-W_0_5-IPC_A 46.5,67 r0 top
C62 "T495D475K050ATE300" T495D475K050ATE300-Footprint-1 35,56.5 r270 top value=4.7µF
C63 "T495D475K050ATE300" T495D475K050ATE300-Footprint-1 30,56.5 r270 top value=4.7µF
C64 "T495D475K050ATE300" T495D475K050ATE300-Footprint-1 30,67.5 r90 top value=4.7µF
C65 "T495D475K050ATE300" T495D475K050ATE300-Footprint-1 35,67.5 r90 top value=4.7µF
C66 "T495D337K010ATE150" T495D337K010ATE150-Footprint-1 69,69.5 r0 top value=330µF
C67 "T495D337K010ATE150" T495D337K010ATE150-Footprint-1 69,64 r0 top value=330µF
C68 "T495D337K010ATE150" T495D337K010ATE150-Footprint-1 54.5,69.5 r180 top value=330µF
C69 "T495D337K010ATE150" T495D337K010ATE150-Footprint-1 69,58.5 r0 top value=330µF
C70 "100n" FP-0402-L_1_0_0_05-W_0_5-IPC_A 133,34.5 r225 bottom
C71 "100n" FP-0402-L_1_0_0_05-W_0_5-IPC_A 137.5,30 r225 bottom
C72 "100n" FP-0402-L_1_0_0_05-W_0_5-IPC_A 134.5,33 r225 bottom
C73 "100n" FP-0402-L_1_0_0_05-W_0_5-IPC_A 136,31.5 r225 bottom
C74 "100n" FP-0402-L_1_0_0_05-W_0_5-IPC_A 144.5,30 r315 bottom
C75 "100n" FP-0402-L_1_0_0_05-W_0_5-IPC_A 149,34.5 r315 bottom
C76 "100n" FP-0402-L_1_0_0_05-W_0_5-IPC_A 146,31.5 r315 bottom
C77 "100n" FP-0402-L_1_0_0_05-W_0_5-IPC_A 147.5,33 r315 bottom
C78 "30p" FP-0402-L_1_0_0_05-W_0_5-IPC_A 142.5,29 r180 bottom
C79 "30p" FP-0402-L_1_0_0_05-W_0_5-IPC_A 139.5,29 r0 bottom
C80 "100n" FP-0402-L_1_0_0_05-W_0_5-IPC_A 150.5,40 r270 top
C81 "GRM188R60J106ME47D" FP-GRM188-0_1-e0_2_0_55-IPC_A 150.5,44 r90 top
C82 "100n" FP-0402-L_1_0_0_05-W_0_5-IPC_A 150.5,32 r270 top
C83 "GRM188R60J106ME47D" FP-GRM188-0_1-e0_2_0_55-IPC_A 150.5,36 r90 top
C84 "10u" FP-0402-L_1_0_0_05-W_0_5-IPC_A 142,35.5 r270 top
C85 "100n" FP-0402-L_1_0_0_05-W_0_5-IPC_A 143.5,35.5 r270 top
C86 "10u" FP-0402-L_1_0_0_05-W_0_5-IPC_A 140,35.5 r270 top
C87 "100n" FP-0402-L_1_0_0_05-W_0_5-IPC_A 138.5,35.5 r270 top
C88 "10u" FP-0402-L_1_0_0_05-W_0_5-IPC_A 148,38 r90 top
C89 "100n" FP-0402-L_1_0_0_05-W_0_5-IPC_A 146.5,38 r90 top
C90 "10u" FP-0402-L_1_0_0_05-W_0_5-IPC_A 148,35.5 r90 top
C91 "100n" FP-0402-L_1_0_0_05-W_0_5-IPC_A 146.5,35.5 r90 top
C92 "10u" FP-0402-L_1_0_0_05-W_0_5-IPC_A 148,33 r90 top
C93 "10n" FP-0402-L_1_0_0_05-W_0_5-IPC_A 146.5,33 r90 top
C94 "10u" FP-0402-L_1_0_0_05-W_0_5-IPC_A 134,33 r90 top
C95 "10n" FP-0402-L_1_0_0_05-W_0_5-IPC_A 135.5,33 r90 top
C96 "10u" FP-0402-L_1_0_0_05-W_0_5-IPC_A 134,35.5 r270 top
C97 "10n" FP-0402-L_1_0_0_05-W_0_5-IPC_A 135.5,35.5 r270 top
C98 "10u" FP-0402-L_1_0_0_05-W_0_5-IPC_A 134,38 r90 top
C99 "10n" FP-0402-L_1_0_0_05-W_0_5-IPC_A 135.5,38 r90 top
C100 "GRM21BR61E226ME44L" FP-GRM21B-0_2-e0_2_0_7-IPC_B 132.5,20 r270 bottom
C101 "GRM21BR61E226ME44L" FP-GRM21B-0_2-e0_2_0_7-IPC_B 139,19 r180 bottom
C102 "GRM21BR61E226ME44L" FP-GRM21B-0_2-e0_2_0_7-IPC_B 149.5,20 r270 bottom
C103 "GRM21BR61E226ME44L" FP-GRM21B-0_2-e0_2_0_7-IPC_B 143,19 r0 bottom
C104 "100n" FP-0402-L_1_0_0_05-W_0_5-IPC_A 32.5,27.5 r270 bottom
C106 "100n" FP-0402-L_1_0_0_05-W_0_5-IPC_A 107,21.5 r0 bottom
C107 "10u" FP-0402-L_1_0_0_05-W_0_5-IPC_A 107,20 r0 bottom
C108 "10n" FP-0402-L_1_0_0_05-W_0_5-IPC_A 111,11 r270 top
C109 "100n" FP-0402-L_1_0_0_05-W_0_5-IPC_A 111.5,20.5 r0 bottom
C110 "10u" FP-0402-L_1_0_0_05-W_0_5-IPC_A 91,3.5 r270 bottom
C111 "100n" FP-0402-L_1_0_0_05-W_0_5-IPC_A 89.5,3.5 r270 bottom
C112 "100n" FP-0402-L_1_0_0_05-W_0_5-IPC_A 129.227,40.227 r315 bottom
C113 "100n" FP-0402-L_1_0_0_05-W_0_5-IPC_A 130.288,41.288 r315 bottom
C114 "100n" FP-0402-L_1_0_0_05-W_0_5-IPC_A 131.348,42.348 r315 bottom
C115 "100n" FP-0402-L_1_0_0_05-W_0_5-IPC_A 132.409,43.409 r315 bottom
C116 "100n" FP-0402-L_1_0_0_05-W_0_5-IPC_A 133.47,44.47 r315 bottom
C117 "100n" FP-0402-L_1_0_0_05-W_0_5-IPC_A 134.53,45.53 r315 bottom
C118 "100n" FP-0402-L_1_0_0_05-W_0_5-IPC_A 137.712,48.712 r315 bottom
C119 "100n" FP-0402-L_1_0_0_05-W_0_5-IPC_A 138.773,49.773 r315 bottom
C120 "100n" FP-0402-L_1_0_0_05-W_0_5-IPC_A 135.591,46.591 r315 bottom
C121 "100n" FP-0402-L_1_0_0_05-W_0_5-IPC_A 136.652,47.652 r315 bottom
C122 "100n" FP-0402-L_1_0_0_05-W_0_5-IPC_A 143.227,49.773 r225 bottom
C123 "100n" FP-0402-L_1_0_0_05-W_0_5-IPC_A 144.288,48.712 r225 bottom
C124 "100n" FP-0402-L_1_0_0_05-W_0_5-IPC_A 147.47,45.53 r225 bottom
C125 "100n" FP-0402-L_1_0_0_05-W_0_5-IPC_A 148.53,44.47 r225 bottom
C126 "100n" FP-0402-L_1_0_0_05-W_0_5-IPC_A 149.591,43.409 r225 bottom
C127 "100n" FP-0402-L_1_0_0_05-W_0_5-IPC_A 150.652,42.348 r225 bottom
C128 "100n" FP-0402-L_1_0_0_05-W_0_5-IPC_A 151.712,41.288 r225 bottom
C129 "100n" FP-0402-L_1_0_0_05-W_0_5-IPC_A 152.773,40.227 r225 bottom
C130 "100n" FP-0402-L_1_0_0_05-W_0_5-IPC_A 145.348,47.652 r225 bottom
C131 "100n" FP-0402-L_1_0_0_05-W_0_5-IPC_A 146.409,46.591 r225 bottom
C132 "22p" FP-0402-L_1_0_0_05-W_0_5-IPC_A 20,78 r270 top
C133 "22p" FP-0402-L_1_0_0_05-W_0_5-IPC_A 24.5,78 r270 top
D1 "MMSZ5242BT1G" ONSC-SOD-123-2-425-04_V 6,32 r270 top
D2 "DNP/MM5Z3V3T1G" ONSC-SOD-523-2-502-01_V 21.75,30.25 r270 bottom
D3 "1N4148W-TP" FP-SOD-123-IPC_A 3.5,32 r90 top
D4 "ESDCAN02-2BWY" FP-SOT323-3L-MFG 30.5,2 r0 bottom value=3pF
D5 "ESD204DQAR" FP-DQA0010A-MFG 91,26 r90 top value=0.55pF
D6 "ESD204DQAR" FP-DQA0010A-MFG 95,26 r90 top value=0.55pF
D7 "150066RG54050" WL-SBCD_0606 138,51 r90 top
D8 "B540C-13-F" FP-SMC-MFG 57,28.5 r0 top value=300pF
D9 "150066RG54050" WL-SBCD_0606 138,45 r90 top
D10 "B540C-13-F" FP-SMC-MFG 57,50 r0 top value=300pF
D11 "ESD204DQAR" FP-DQA0010A-MFG 130.865,16.5 r270 bottom value=0.55pF
D12 "ESD204DQAR" FP-DQA0010A-MFG 135.5,19 r270 bottom value=0.55pF
D13 "ESD204DQAR" FP-DQA0010A-MFG 146.5,19 r90 bottom value=0.55pF
D14 "ESD204DQAR" FP-DQA0010A-MFG 151.135,16.5 r90 bottom value=0.55pF
D15 "150066RG54050" WL-SBCD_0606 138,48 r90 top
D16 "150066RG54050" WL-SBCD_0606 138,42 r90 top
D17 "150066RG54050" WL-SBCD_0606 8.5,45.5 r270 top
F1 ".5" FP-0685T-MFG 135,73 r0 top
F2 ".5" FP-0685T-MFG 44.5,75.5 r270 top
F3 "2.5" FP-0685T-MFG 25,42 r0 top
F4 ".5" FP-0685T-MFG 57.5,75.5 r270 top
F5 "1.5" FP-0685T-MFG 25,62 r0 top
F6 "2.5" FP-0685T-MFG 127,-8.5 r0 top
F7 "15" FP-0685T-MFG 25,27 r0 top
F10 "1" FP-0685T-MFG 89,67 r0 bottom
F11_DISP_0 ".25" FP-0685T-MFG 135,78 r180 top (schematic designator F11)
F11_DISP_1 ".25" FP-0685T-MFG 111,78 r180 top (schematic designator F11)
F12 ".25" FP-0685T-MFG 127,21.5 r0 top
F13 ".25" FP-0685T-MFG 127,24 r0 top
F14 ".25" FP-0685T-MFG 155,21.5 r180 top
F15 ".25" FP-0685T-MFG 155,24 r180 top
J1 "776163-1" FP-776163-1-MFG 38.5,-4 r0 top
J2 "BM04B-SRSS-TBT(LF)(SN)" FP-BM04B-SRSS-TBT_LF_SN-MFG 127,72.5 r0 top
J3 "47053-1000" FP-470531000-MFG 40,82 r0 top
J4 "47053-1000" FP-470531000-MFG 53,82 r0 top
J5 "FM4-NZRP-PCB-1" FM4-NZRP-PCB-1-Footprint-1 141,11 r270 top
J6 "ARJ-196" ARJ-196-Footprint-1 93,1 r0 top
J7 "12402012E212A" 12402012E212A-Footprint-1 20,86 r180 top
J8 "RPI CM5 W/ COOLER" "RPI CM5 W_ COOLER-Footprint-1" 127,65 r180 top
J9 "15-91-0140" 15-91-0140-Footprint-1 138,62 r270 top
J10 "1-2199230-6" FP-1-2199230-6-MFG 79,50.5 r270 bottom locked
J13_DISP_0 "208658-1052" 208658-1052-Footprint-1 123,88 r180 top (schematic designator J13)
J13_DISP_1 "208658-1052" 208658-1052-Footprint-1 99,88 r180 top (schematic designator J13)
J14_DISP_0 "292303-7" FP-292303-7-MFG 147,82 r270 top (schematic designator J14)
J14_DISP_1 "292303-7" FP-292303-7-MFG 75,82 r270 top (schematic designator J14)
J16 "FA1-NDRP-PCB-8" FA1-NDRP-PCB-8-Footprint-1 113,3 r180 top
J17 "B3B-XH-AM(LF)(SN)" FP-B3B-XH-AM_LF_SN-MFG 78.5,19 r180 top
J18 "B3B-XH-AM(LF)(SN)" FP-B3B-XH-AM_LF_SN-MFG 78.5,12.5 r180 top
J19 "B8B-XH-AM(LF)(SN)" FP-B8B-XH-AM_LF_SN-MFG 36.5,19 r0 top
J20 "B8B-XH-AM(LF)(SN)" FP-B8B-XH-AM_LF_SN-MFG 61.5,19 r180 top
L1 "SRF4532-510Y" FP-SRF4532-MFG 11,21 r90 bottom
L2 "SRR1260-150M" FP-SRR1260-MFG 57,40 r0 top
L3 "SRR1260-150M" FP-SRR1260-MFG 57,60 r0 top
L4 "744066101" WE-TPC_1038 127,14.5 r90 top
L5 "ADL32VHC-220M" FP-1210POC-MFG 132.5,24 r90 bottom value=22uH
L6 "PFL1609-561MEW" FP-PFL1609-MFG 130.5,27 r180 bottom value=0.56uH
L7 "744066101" WE-TPC_1038 135.5,23 r0 top
L8 "ADL32VHC-220M" FP-1210POC-MFG 139,22 r180 bottom value=22uH
L9 "PFL1609-561MEW" FP-PFL1609-MFG 135.75,22 r180 bottom value=0.56uH
L10 "744066101" WE-TPC_1038 155,14.5 r270 top
L11 "ADL32VHC-220M" FP-1210POC-MFG 149.5,24 r90 bottom value=22uH
L12 "PFL1609-561MEW" FP-PFL1609-MFG 151.5,27 r0 bottom value=0.56uH
L13 "744066101" WE-TPC_1038 146.5,23 r0 top
L14 "ADL32VHC-220M" FP-1210POC-MFG 143,22 r0 bottom value=22uH
L15 "PFL1609-561MEW" FP-PFL1609-MFG 146.25,22 r0 bottom value=0.56uH
L16 "LQW18AN27NJ00D" FP-LQW18AN_00-MFG 108.5,9.5 r225 top
MH1 "PTHV6" "PTHV6 M2" 4,10 r0 top net-tie
MH2 "PTHV6" "PTHV6 M2" 5,83 r0 top net-tie
MH3 "PTHV6" "PTHV6 M2" 159,83 r0 top net-tie
MH4 "PTHV6" "PTHV6 M2" 81,5 r0 top net-tie
MH5 "PTHV6" "PTHV6 M2" 130,5 r0 top net-tie
MH6 "PTHV6" "PTHV6 M2" 152,5 r0 top net-tie
MH7 "PTHV6" "PTHV6 M2" 159,5 r0 top net-tie
MH8 "PTHV6" "PTHV6 M2" 105,5 r0 top net-tie
MH9 "PTHV6" "PTHV6 M2" 122,5 r0 top net-tie
MH10 "PTHV6" "PTHV6 M2" 87,83 r0 top net-tie
MH11 "PTHV6" "PTHV6 M2" 63,83 r0 top net-tie
MH12 "PTHV6" "PTHV6 M2" 111,83 r0 top net-tie
MH13 "PTHV6" "PTHV6 M2" 135,83 r0 top net-tie
MH14 "PTHV6" "PTHV6 M2" 30,83 r0 top net-tie
MP1 "9774025243R" 9774025243 159,50.5 r180 bottom locked
Q1 "BSS138W-7-F" DIOD-SOT323-3_V 38,75.5 r90 top
Q2 "BSS138W-7-F" DIOD-SOT323-3_V 51,75.5 r90 top
Q3 "SISH615ADN-T1-GE3" SISH615ADN-T1-GE3-Footprint-1 10.038,28.01 r180 top
Q4 "SISH615ADN-T1-GE3" SISH615ADN-T1-GE3-Footprint-1 9.963,32.49 r0 top
Q5 "SISH615ADN-T1-GE3" SISH615ADN-T1-GE3-Footprint-1 14.038,28.01 r180 top
Q6 "SISH615ADN-T1-GE3" SISH615ADN-T1-GE3-Footprint-1 13.963,32.49 r0 top
Q7 "BSS138W-7-F" DIOD-SOT323-3_V 13,30.25 r0 bottom
Q8 "BSS138W-7-F" DIOD-SOT323-3_V 3,38.5 r90 top
Q9 "SIP32510DT-T1-GE3" SOT95P284X110-6N 89,63 r90 bottom
Q10 "SIP32510DT-T1-GE3" SOT95P284X110-6N 12.5,55 r270 bottom
Q11 "SIP32510DT-T1-GE3" SOT95P284X110-6N 91,9.5 r0 bottom
Q13_DISP_0 "SIP32510DT-T1-GE3" SOT95P284X110-6N 158,76 r90 top (schematic designator Q13)
Q13_DISP_1 "SIP32510DT-T1-GE3" SOT95P284X110-6N 86,76 r90 top (schematic designator Q13)
Q14 "SISH615ADN-T1-GE3" SISH615ADN-T1-GE3-Footprint-1 29,25 r270 top
Q15 "SISH615ADN-T1-GE3" SISH615ADN-T1-GE3-Footprint-1 29,29 r270 top
Q16 "BSS138W-7-F" DIOD-SOT323-3_V 25.5,26 r180 bottom
Q17 "DMG1013UW-7" DIOD-SOT323-3_V 112.5,11 r0 bottom
Q18 "BSS138W-7-F" DIOD-SOT323-3_V 106.5,11 r270 bottom
Q19 "FDC6327C" FAIR-SOT23-6_V 120.5,32 r90 bottom
R1 "100k" R0603B 133.5,68.5 r180 bottom
R2 "100k" R0603B 42,75.5 r90 top
R3 "1k" R0603B 35,73 r0 top
R4 "100k" R0603B 38,73 r0 top
R5 "100k" R0603B 55,75.5 r90 top
R6 "1k" R0603B 48.15,73 r0 top
R7 "100k" R0603B 51,73 r0 top
R8 "1k" R0603B 92,21.5 r270 bottom
R9 "1k" R0603B 94,21.5 r270 bottom
R10 "1k" R0603B 6,37.5 r0 top
R11 "100k" R0603B 6,39.5 r180 top
R12 "100k" R0603B 9.75,32.5 r0 bottom
R13 "100k" R0603B 18.75,30.25 r270 bottom
R14 "24k" R0603B 20.25,30.25 r90 bottom
R15 "100k" R0603B 15.75,30.25 r90 bottom
R16 "1k" R0603B 17.25,30.25 r270 bottom
R17 "1k" R0603B 9.75,29.5 r0 bottom
R18 "100k" R0603B 9.75,31 r0 bottom
R19 "100k" R0603B 2.5,28 r270 bottom
R20 "1k" R0603B 2.5,31 r90 bottom
R21 "60.4" R0603B 14,20 r270 bottom
R22 "1k" R0603B 13,13 r90 bottom
R23 "27" R0603B 21.5,78 r270 top
R24 "60.4" R0603B 8,20 r90 bottom
R25 "1k" R0603B 135,50.25 r180 top
R26 "1k" R0603B 135,51.75 r180 top
R27 "100k" R0603B 107,25.75 r0 bottom
R28 "1k" R0603B 44,30.7 r90 bottom
R29 "DNP" R0603B 40,48 r90 top
R30 "DNP" R0603B 38.5,48 r270 top
R31 "ERT-J1VR103J" RESC1608X90X30ML15T20 44,33.45 r270 bottom
R32 "1k" R0603B 67,43.5 r90 bottom
R33 "100k" R0603B 68.5,43.5 r270 bottom
R34 "100k" R0603B 68.5,40.5 r90 bottom
R35 "100k" R0603B 67,40.5 r270 bottom
R36 "0402 JUMPER" RESC1005X40X25ML05T05 88,48.5 r0 bottom
R37 "0402 JUMPER" RESC1005X40X25ML05T05 88,47 r0 bottom
R38 "0402 JUMPER" RESC1005X40X25ML05T05 88,45.5 r0 bottom
R39 "330" R0603B 88,44 r180 bottom
R40 "100k" R0603B 88,51.5 r180 bottom
R41 "100k" R0603B 88,50 r180 bottom
R42 "1k" R0603B 135,44.25 r180 top
R43 "DNP" R0603B 86,63 r90 bottom
R44 "1k" R0603B 135,45.75 r180 top
R45 "1k" R0603B 92,66.5 r90 bottom
R46 "100k" R0603B 92,63.75 r90 bottom
R47 "1k" R0603B 35.5,75.5 r270 top
R48 "0402 JUMPER" RESC1005X40X25ML05T05 95.5,57.5 r0 bottom
R49 "0402 JUMPER" RESC1005X40X25ML05T05 95,55 r90 bottom
R50 "0402 JUMPER" RESC1005X40X25ML05T05 99,52.5 r0 bottom
R51 "0402 JUMPER" RESC1005X40X25ML05T05 100,55 r270 bottom
R52 "100k" R0603B 16.5,36.5 r90 bottom
R53 "1k" R0603B 119,17.5 r0 top
R54 "100k" R0603B 16.5,44.5 r270 bottom
R55 "56" R0603B 422,-42 r90 top
R56 "56" R0603B 390,-42 r90 top
R57 "1k" R0603B 366,-42 r90 top
R58 "ERT-J1VR103J" RESC1608X90X30ML15T20 361,-41 r0 top
R59 "DNP" R0603B 15.5,55 r270 bottom
R60 "1k" R0603B 15.5,58.5 r0 bottom
R61 "100k" R0603B 12.5,58.5 r0 bottom
R62 "DNP" R0603B 91,12.5 r0 bottom
R63 "1k" R0603B 88,12.5 r180 bottom
R64 "100k" R0603B 94,12.5 r180 bottom
R65_DISP_0 "100k" R0603B 161,76 r90 top (schematic designator R65)
R65_DISP_1 "100k" R0603B 89,76 r90 top (schematic designator R65)
R66_DISP_0 "1k" R0603B 158,73 r180 top (schematic designator R66)
R66_DISP_1 "1k" R0603B 86,73 r180 top (schematic designator R66)
R67 "27" R0603B 61.65,93.5 r0 bottom
R68 "0402 JUMPER" RESC1005X40X25ML05T05 122,66.5 r270 bottom
R69 "DNP" R0603B 106.25,63.5 r270 bottom
R70 "0402 JUMPER" RESC1005X40X25ML05T05 123.5,66.5 r270 bottom
R71 "27" R0603B 103.05,63.5 r90 bottom
R72 "0402 JUMPER" RESC1005X40X25ML05T05 122,67.5 r90 bottom
R73 "27" R0603B 61.65,92 r0 bottom
R74 "27" R0603B 101.55,63.5 r90 bottom
R75 "0402 JUMPER" RESC1005X40X25ML05T05 123.5,67.5 r90 bottom
R76 "27" R0603B 79,76 r0 bottom
R77 "0402 JUMPER" RESC1005X40X25ML05T05 105.45,58.5 r180 bottom
R78 "0402 JUMPER" RESC1005X40X25ML05T05 120.5,66.5 r270 bottom
R79 "27" R0603B 79,74.5 r0 bottom
R80 "DNP" RESC1005X40X25ML05T05 106.5,58.5 r180 bottom
R81 "DNP" RESC1005X40X25ML05T05 120.5,67.5 r270 bottom
R82 "27" R0603B 143,74.5 r180 bottom
R83 "27" R0603B 143,76 r180 bottom
R84 "1k" R0603B 44,50 r90 bottom
R85 "1k" R0603B 40,67.5 r90 top
R86 "100k" R0603B 38.5,67.5 r270 top
R87 "ERT-J1VR103J" RESC1608X90X30ML15T20 44,53 r270 bottom
R88 "1k" R0603B 67,50.5 r270 bottom
R89 "100k" R0603B 65.5,50.5 r90 bottom
R90 "10k" R0603B 65.5,53.5 r270 bottom
R91 "100k" R0603B 67,53.5 r90 bottom
R92 "402" R0603B 140,32.75 r270 top
R93 "100k" R0603B 142,32.75 r90 top
R94 "49.9" R0603B 132.5,31 r45 bottom
R95 "49.9" R0603B 134,29.5 r45 bottom
R96 "DNP" R0603B 131.5,36.5 r90 bottom
R97 "DNP" R0603B 149,38 r90 bottom
R98 "10k" R0603B 130,36.5 r270 bottom
R99 "10k" R0603B 150.5,38 r270 bottom
R100 "49.9" R0603B 148,29.5 r135 bottom
R101 "49.9" R0603B 149.5,31 r135 bottom
R102 "120" R0603B 157,28.5 r0 top
R103 "5.1k" R0603B 133,27 r0 bottom
R104 "5.1k" R0603B 137.25,25 r90 bottom
R105 "5.1k" R0603B 149,27 r180 bottom
R106 "5.1k" R0603B 144.75,25 r90 bottom
R107 "1k" R0603B 34.5,27.5 r90 bottom
R108 "100k" R0603B 36,27.5 r270 bottom
R109 "100k" R0603B 25.5,22 r180 bottom
R110 "1k" R0603B 25.5,23.5 r0 bottom
R111 "1k" R0603B 30,26 r90 bottom
R112 "100k" R0603B 28.5,26 r90 bottom
R115 "0402 JUMPER" RESC1005X40X25ML05T05 106.5,11 r270 top
R116 "100k" R0603B 106.5,17.5 r270 bottom
R117 "1k" R0603B 108.5,11 r90 bottom
R118 "100k" R0603B 110,11 r90 bottom
R119 "10" R0603B 112.5,11 r90 top
R120 "560" R0603B 111.5,13.5 r180 bottom
R121 "100k" R0603B 111.5,15 r180 bottom
R122 "100k" R0603B 114,11 r90 top
R123 "1k" R0603B 106.5,15 r180 bottom
R124 "100k" R0603B 106.5,13.5 r0 bottom
R125 "1k" R0603B 108,17.5 r270 bottom
R126 "1k" R0603B 121.5,28.5 r270 bottom
R127 "1k" R0603B 135,47.25 r0 top
R128 "100k" R0603B 123,28.5 r90 bottom
R129 "1k" R0603B 135,48.75 r0 top
R130 "1k" R0603B 119.5,28.5 r90 bottom
R131 "100k" R0603B 118,28.5 r270 bottom
R132 "1k" R0603B 48.5,75.5 r270 top
R133 "1k" R0603B 131,70 r0 bottom
R134 "0" R0603B 131,68.5 r0 bottom
R135 "0" R0603B 40.5,75.5 r270 top
R136 "0" R0603B 53.5,75.5 r270 top
R137 "100k" R0603B 103.75,71 r180 bottom
R138 "1k" R0603B 135,41.25 r0 top
R139 "1k" R0603B 135,42.75 r0 top
R140 "27" R0603B 23,78 r270 top
R141 "1k" R0603B 6,41 r180 top
R142 "1k" R0603B 3,41 r180 top
R143 "1k" R0603B 3,36 r180 top
R144 "100k" R0603B 119,16 r180 top
R145 "DNP" RESC1005X40X25ML05T05 121,26.5 r0 top
SD1 "473521001" MOLX-473521001_V 12,55 r270 top
SW1 "KXT331LHS" FP-KXT331LHS-MFG 4,45.5 r0 top
TP1 "TPAD6R" "New footprint 1" 85.5,52 r90 bottom
TP2 "TPAD6R" "New footprint 1" 85.5,50.5 r90 bottom
TP3 "TPAD6R" "New footprint 1" 85.5,49 r90 bottom
TP4 "TPAD6R" "New footprint 1" 138,-62.5 r90 top
U1 "ACS711KLCTR-25AB-T" FP-LC-8-IPC_A 12,38 r180 top
U2 "TCAN1146DYYRQ1" TCAN1146DYYRQ1-Footprint-1 5.5,28 r270 bottom
U3 "LM2678S-5.0" KTW0007B_N 44,38 r270 top
U4 "ACS711KLCTR-12AB-T" FP-LC-8-IPC_C 68.5,43 r90 top
U5 "MCP2515-I/SO" FP-C04-051-MFG 9,40.5 r0 bottom
U6 "ADC088S022CIMT/NOPB" MTC16_L 430,-43 r0 top
U7 "ADC088S022CIMT/NOPB" MTC16_L 398,-43 r0 top
U8 "TUSB2036VFR" VF0032A_M 113,67.5 r0 bottom
U9 "LM2678S-3.3/NOPB" KTW0007B_N 44,57.65 r270 top
U10 "ACS711KLCTR-12AB-T" FP-LC-8-IPC_C 68.5,51 r270 top
U11 "MAX96724FGTN/V+" MAX96724FGTN_V+-Footprint-1 141,38 r135 bottom
U12 "LD1117S18TR" SOT-223_M 157,42 r0 top
U13 "LD1117S12TR" SOT-223_M 157,34 r0 top
U14 "ACS711KLCTR-25AB-T" FP-LC-8-IPC_A 35,27 r90 top
U16 "MAX-M10M-00B" MAX-M10M-00B-Footprint-1 110,19 r270 top
U17 "LT6000IDCB#TRMPBF" FP-DCB-6-05-08-1715-MFG 111.5,17.5 r180 bottom
U18 "ACS711KLCTR-12AB-T" FP-LC-8-IPC_C 121,22.75 r180 top
XF1 "3557-2" KSTN-3557-2 12,21 r180 top
Y1 "ASDK-32.768KHZ-LRT" FP-ASDK-MFG 97.5,55 r180 bottom
Y2 "ABM8G-16.000MHZ-4Y-T3" FP-ABM8G-MFG 9,49.5 r0 bottom
Y3 "ABM8-48.000MHZ-B2-T" FP-ABM8-MFG 106,55 r0 bottom
Y4 "ABM8G-25.000MHZ-18-D2Y-T" FP-ABM8G-MFG 141,26 r180 bottom

## Footprints (in the part's own frame and the unit in brackets; to place one, negate y for a bottom-side part, rotate by r counter-clockwise, add the part's x,y. Pads: shape width x height; smd on the part's side, far side on the other; paste and mask are expansions set on the pad)
15-91-0140-Footprint-1 [mm]
  rect 1.27x3.683 smd paste+0 mask+0: A1(-7.62,2.22) A2(-5.08,2.22) A3(-2.54,2.22) A4(0,2.22) A5(2.54,2.22) A6(5.08,2.22) A7(7.62,2.22) B1(-7.62,-2.22) B2(-5.08,-2.22) B3(-2.54,-2.22) B4(0,-2.22) B5(2.54,-2.22) B6(5.08,-2.22) B7(7.62,-2.22)
  silkscreen extent -10.38,-2.67 9.02,2.67, body extent -8.89,-3.49 8.89,3.49, height 9.65
208658-1052-Footprint-1 [mm]
  rect 0.298x2.6 smd mask+0.064: 1(4.5,10.31) 2(4,10.31) 3(3.5,10.31) 4(3,10.31) 5(2.5,10.31) 6(2,10.31) 7(1.5,10.31) 8(1,10.31) 9(0.5,10.31) 10(0,10.31) 11(-0.5,10.31) 12(-1,10.31) 13(-1.5,10.31) 14(-2,10.31) 15(-2.5,10.31) 16(-3,10.31) 17(-3.5,10.31) 18(-4,10.31) 19(-4.5,10.31)
  oval 1.5x3.3 hole 0.9 slot 2.7 at 90 deg mask+0.064: SH1(7.25,9.55) SH2(-7.25,9.55)
  oval 1.5x2.3 hole 0.9 slot 1.7 at 90 deg mask+0.064: SH3(7.25,3.59) SH4(-7.25,3.59)
  silkscreen extent -7.65,0 7.65,13.08, body extent -7.5,-1.02 7.5,11.13, height 16.1
12402012E212A-Footprint-1 [mm]
  rect 0.6x1.14 smd: A1_B12(-3.2,4.75) A4_B9(-2.4,4.75) B1_A12(3.2,4.75) B4_A9(2.4,4.75)
  rect 0.3x1.14 smd: A5(-1.25,4.75) A6(-0.25,4.75) A7(0.25,4.75) A8(1.25,4.75) B5(1.75,4.75) B6(0.75,4.75) B7(-0.75,4.75) B8(-1.75,4.75)
  oval 1.05x2.1 hole 0.6 slot 1.7 at 90 deg: SH1(-4.32,4.18) SH2(4.32,4.18)
  oval 0.9x1.8 hole 0.6 slot 1.4 at 90 deg: SH3(-4.32,0) SH4(4.32,0)
  round 0.65 hole 0.65 unplated: ""(-2.89,3.68) ""(2.89,3.68)
  silkscreen extent -4.47,-2.6 4.47,2.81, body extent -4.46,-2.62 4.47,4.98, height 3.23
9774025243 [mm] "SMT Steel Spacer with internal Thread M2, height 2.5mm"
  round 5.3 / inner round 0 / far side round 0 hole 3 unplated: 1(0,0)
  body extent -2.17,-2.16 2.18,2.16, height 2.5
ARJ-196-Footprint-1 [mm]
  round 1.4 hole 0.9: 1(5.1,14.35) 2(3.06,14.35) 3(1.02,14.35) 4(-1.02,14.35) 5(-3.06,14.35) 6(-5.1,14.35) 7(6.12,16.89) 8(4.08,16.89) 9(2.04,16.89) 10(-2.04,16.89) 11(-4.08,16.89) 12(-6.12,16.89) 13(6.095,19.69) 14(3.555,19.69) 15(-3.555,19.69) 16(-6.095,19.69) U1(-3.5,5.21) U2(-1,5.21) U3(1,5.21) U4(3.5,5.21)
  round 2.4 hole 1.6: MH1(8.065,0) MH2(-8.065,0) MH3(8.065,10.62) MH4(-8.065,10.62)
  round 1.155 hole 2.31 unplated: MH5(6.565,2.51) MH6(-6.565,2.51)
  silkscreen extent -8.4,-7.9 9.95,18.1, body extent -10.53,-8 10.53,20, height 23.48
DIOD-SOT323-3_V [mm] "SOT323, 3-Leads, Body 2.2x1.35mm, Pitch 0.65mm"
  rect 0.9x0.7 smd: 1(-0.95,0.65) 2(-0.95,-0.65) 3(0.95,0)
  silkscreen extent -1.07,-1.1 0.67,1.67, body extent -1.1,-1.1 1.1,1.1, height 1.07
FA1-NDRP-PCB-8-Footprint-1 [mil]
  round 75 hole 46: 1(0,0)
  round 100 hole 67: 2(-100,100) 2(-100,-100) 2(100,100) 2(100,-100)
  silkscreen extent -175,-175 175,250, body extent -157,-183 157,758, height 421
FAIR-SOT23-6_V [mm] "SOT23, 6-Leads, Body 2.9x1.6mm, Pitch 0.95mm"
  rect 1x0.7 smd: 1(-1.3,0.95) 2(-1.3,0) 3(-1.3,-0.95) 4(1.3,-0.95) 5(1.3,0) 6(1.3,0.95)
  silkscreen extent -1.42,-1.5 0.4,1.98, body extent -1.4,-1.45 1.4,1.45, height 1.45
FM4-NZRP-PCB-1-Footprint-1 [mm]
  round 1.2 hole 0.7: 1(-1.91,-2) 2(2.09,-2) 3(2.09,2) 4(-1.91,2)
  round 2.1 hole 1.4: MH1(0,0)
  round 2.55 hole 1.7: MH2(-3.5,-4.575) MH3(4.6,-4.575) MH4(4.6,4.575) MH5(-3.5,4.575)
  silkscreen extent -5.9,-6.5 17.25,6.5, body extent -4.76,-5.99 17.8,5.99, height 15.79
FP-1-2199230-6-MFG [mm]
  rect 0.3x1.55 smd paste+0 mask+0: 1(-9.25,3.9) 2(-9,-3.65) 3(-8.75,3.9) 4(-8.5,-3.65) 5(-8.25,3.9) 6(-8,-3.65) 7(-7.75,3.9) 8(-7.5,-3.65) 9(-7.25,3.9) 10(-7,-3.65) 11(-6.75,3.9) 12(-6.5,-3.65) 13(-6.25,3.9) 14(-6,-3.65) 15(-5.75,3.9) 16(-5.5,-3.65) 17(-5.25,3.9) 18(-5,-3.65) 19(-4.75,3.9) 20(-4.5,-3.65) 21(-4.25,3.9) 22(-4,-3.65) 23(-3.75,3.9) 24(-3.5,-3.65) 25(-3.25,3.9) 26(-3,-3.65) 27(-2.75,3.9) 28(-2.5,-3.65) 29(-2.25,3.9) 30(-2,-3.65) 31(-1.75,3.9) 32(-1.5,-3.65) 33(-1.25,3.9) 34(-1,-3.65) 35(-0.75,3.9) 36(-0.5,-3.65) 37(-0.25,3.9) 38(0,-3.65) 39(0.25,3.9) 40(0.5,-3.65) 41(0.75,3.9) 42(1,-3.65) 43(1.25,3.9) 44(1.5,-3.65) 45(1.75,3.9) 46(2,-3.65) 47(2.25,3.9) 48(2.5,-3.65) 49(2.75,3.9) 50(3,-3.65) 51(3.25,3.9) 52(3.5,-3.65) 53(3.75,3.9) 54(4,-3.65) 55(4.25,3.9) 56(4.5,-3.65) 57(4.75,3.9) 58(5,-3.65) 67(7.25,3.9) 68(7.5,-3.65) 69(7.75,3.9) 70(8,-3.65) 71(8.25,3.9) 72(8.5,-3.65) 73(8.75,3.9) 74(9,-3.65) 75(9.25,3.9)
  rect 1.2x2.75 smd paste+0 mask+0: 76(-10.35,3.125) 77(10.35,3.125)
  round 1.1 hole 1.1 unplated paste-2539.97 mask+0: ""(-10,-1.375)
  round 1.6 hole 1.6 unplated paste-2539.97 mask+0: ""(10,-1.375)
  silkscreen extent -11,-3.98 11,5.35, body extent -10.95,-4.23 10.95,4.47, height 4.21
FP-0402-L_1_0_0_05-W_0_5-IPC_A [mm]
  rect 0.715x0.672 smd paste+0 mask+0: 1(-0.479,0) 2(0.479,0)
  silkscreen extent -0.84,-0.74 0.84,0.74, body extent -0.5,-0.25 0.5,0.25, height 0.55
FP-0685T-MFG [mm]
  rect 1.14x1.78 smd paste+0 mask+0: 1(-1.33,0) 2(1.33,0)
  silkscreen extent -0.39,-0.89 0.39,0.89, body extent -2,-0.99 2,0.99, height 0.25
FP-1210POC-MFG [mm]
  rect 0.65x2.65 smd paste+0 mask+0: 1(-1.27,0) 2(1.27,0)
  silkscreen extent -0.57,-1.34 0.57,1.34, body extent -1.65,-1.34 1.65,1.34, height 3
FP-292303-7-MFG [mm]
  rect 3x1.25 smd paste+0 mask+0: 1(6.96,3.5) 2(6.96,1) 3(6.96,-1) 4(6.96,-3.5)
  round 3.5 hole 2.3 paste-2539.97 mask+0: 5(3.28,6.57) 6(3.28,-6.57)
  silkscreen extent 5.4,-7.47 9.15,7.47, body extent -7.1,-8.42 8.56,8.42, height 0.25
FP-776163-1-MFG [mm]
  rect 2.65x2.65 hole 1.75 paste-2539.97 mask+0: 1(-22,16.95)
  round 2.65 hole 1.75 paste-2539.97 mask+0: 2(-18,16.95) 3(-14,16.95) 4(-10,16.95) 5(-6,16.95) 6(-2,16.95) 7(2,16.95) 8(6,16.95) 9(10,16.95) 10(14,16.95) 11(18,16.95) 12(22,16.95) 13(-20,12.95) 14(-16,12.95) 15(-12,12.95) 16(-8,12.95) 17(-4,12.95) 18(0,12.95) 19(4,12.95) 20(8,12.95) 21(12,12.95) 22(16,12.95) 23(20,12.95) 24(-22,8.95) 25(-18,8.95) 26(-14,8.95) 27(-10,8.95) 28(-6,8.95) 29(-2,8.95) 30(2,8.95) 31(6,8.95) 32(10,8.95) 33(14,8.95) 34(18,8.95) 35(22,8.95)
  round 2.85 hole 2.85 unplated paste-2539.97 mask+0: ""(-28.5,12.45) ""(28.5,12.45)
  silkscreen extent -39.17,4.1 38.55,19.15, body extent -38.65,-19.25 38.65,19.25, height 0.25
FP-470531000-MFG [mm]
  rect 1.57x1.57 hole 1.02 paste-2539.97 mask+0: 1(3.81,-0.38)
  round 1.57 hole 1.02 paste-2539.97 mask+0: 2(1.27,-0.38) 3(-1.27,-0.38) 4(-3.81,-0.38)
  round 1.25 hole 1.25 unplated paste-2539.97 mask+0: ""(-1.27,-2.54)
  silkscreen extent -5.2,-3.02 5.93,3.02, body extent -5.3,-3.26 5.3,3.12, height 0.25
FP-ABM8-MFG [mm]
  rect 1.3x1.05 smd paste+0 mask+0: 1(-1.15,-0.875) 2(1.15,-0.875) 3(1.15,0.875) 4(-1.15,0.875)
  silkscreen extent -2.5,-1.88 1.7,1.88, body extent -1.6,-1.25 1.6,1.25, height 0.8
FP-ABM8G-MFG [mm]
  rect 1.4x1.2 smd paste+0 mask+0: 1(-1.1,-0.85) 2(1.1,-0.85) 3(1.1,0.85) 4(-1.1,0.85)
  silkscreen extent -2.47,-1.83 1.6,1.83, body extent -1.6,-1.25 1.6,1.25, height 1
FP-ASDK-MFG [mm]
  rect 1x0.9 smd paste+0 mask+0: 1(-0.813,-0.613) 2(0.813,-0.613) 3(0.813,0.613) 4(-0.813,0.613)
  silkscreen extent -1.7,-1.76 1.7,1.05, body extent -1.25,-1 1.25,1, height 0.95
FP-B3B-XH-AM_LF_SN-MFG [mm]
  rect 1.4x1.4 hole 0.9 paste-2539.97 mask+0: 1(-2.5,-0.525)
  round 1.4 hole 0.9 paste-2539.97 mask+0: 2(0,-0.525) 3(2.5,-0.525)
  round 1.1 hole 1.1 unplated paste-2539.97 mask+0: ""(4.1,1.475)
  silkscreen extent -5.55,-2.88 4.95,2.88, body extent -5.05,-2.98 5.05,2.98, height 0.25
FP-B8B-XH-AM_LF_SN-MFG [mm]
  rect 1.4x1.4 hole 0.9 paste-2539.97 mask+0: 1(8.75,-0.525)
  round 1.4 hole 0.9 paste-2539.97 mask+0: 2(6.25,-0.525) 3(3.75,-0.525) 4(1.25,-0.525) 5(-1.25,-0.525) 6(-3.75,-0.525) 7(-6.25,-0.525) 8(-8.75,-0.525)
  round 0 all layers, no hole paste-2539.97 mask+0: ""(10.35,1.475)
  silkscreen extent -11.2,-2.88 11.93,2.88, body extent -11.3,-2.98 11.3,2.98, height 0.25
FP-BM04B-SRSS-TBT_LF_SN-MFG [mm]
  rect 0.6x1.55 smd paste+0 mask+0: 1(-1.5,-1.775) 2(-0.5,-1.775) 3(0.5,-1.775) 4(1.5,-1.775)
  rect 1.2x1.8 smd paste+0 mask+0: 5(-2.8,0.75) 6(2.8,0.75)
  silkscreen extent -3,-3.32 3,1.45, body extent -3.5,-2.65 3.5,1.75, height 0.25
FP-C04-051-MFG [mm]
  rrect100% 1.9x0.6 smd paste+0 mask+0: 1(-4.7,5.08) 2(-4.7,3.81) 3(-4.7,2.54) 4(-4.7,1.27) 5(-4.7,0) 6(-4.7,-1.27) 7(-4.7,-2.54) 8(-4.7,-3.81) 9(-4.7,-5.08) 10(4.7,-5.08) 11(4.7,-3.81) 12(4.7,-2.54) 13(4.7,-1.27) 14(4.7,0) 15(4.7,1.27) 16(4.7,2.54) 17(4.7,3.81) 18(4.7,5.08)
  silkscreen extent -6.42,-5.87 3.8,5.87, body extent -5.15,-5.77 5.15,5.77, height 2.65
FP-DCB-6-05-08-1715-MFG [mm]
  rect 0.7x0.25 smd paste+0 mask+0: 1(-1.425,0.5) 2(-1.425,0) 3(-1.425,-0.5) 4(1.425,-0.5) 5(1.425,0) 6(1.425,0.5)
  rect 1.65x1.35 smd paste+0 mask+0: 7(0,0)
  silkscreen extent -2.58,-1.05 1.55,1.05, body extent -1.5,-1 1.5,1, height 0.8
FP-DQA0010A-MFG [mm]
  rrect50% 0.565x0.2 smd paste+0 mask+0: 1(-0.417,1) 2(-0.417,0.5) 4(-0.417,-0.5) 5(-0.417,-1) 6(0.417,-1) 7(0.417,-0.5) 9(0.417,0.5) 10(0.417,1)
  rrect25% 0.565x0.4 smd paste-1000 mask+0: 3(-0.417,0) 8(0.417,0)
  silkscreen extent -1.37,-1.48 0.55,1.48, body extent -0.8,-1.4 0.8,1.4, height 0.25
FP-GRM21B-0_2-e0_2_0_7-IPC_B [mm]
  rect 1.255x1.456 smd paste+0 mask+0: 1(-0.826,0) 2(0.826,0)
  silkscreen extent -1.45,-1.13 1.45,1.13, body extent -1,-0.63 1,0.63, height 1.45
FP-GRM188-0_1-e0_2_0_55-IPC_A [mm]
  rect 1.208x1.012 smd paste+0 mask+0: 1(-0.802,0) 2(0.802,0)
  silkscreen extent -1.41,-0.91 1.41,0.91, body extent -1.91,-1.01 1.91,1.01, height 0.25
FP-KXT331LHS-MFG [mm]
  rect 0.55x1.5 smd paste+0 mask+0: 1(-1.625,0) 2(1.625,0)
  silkscreen extent -1.65,-1.15 1.65,1.15, body extent -1.75,-1.1 1.75,1.1, height 0.7
FP-LC-8-IPC_A [mm]
  rect 2.474x0.622 smd paste+0 mask+0: 1(-2.416,1.905)
  rrect100% 2.474x0.622 smd paste+0 mask+0: 2(-2.416,0.635) 3(-2.416,-0.635) 4(-2.416,-1.905) 5(2.416,-1.905) 6(2.416,-0.635) 7(2.416,0.635) 8(2.416,1.905)
  silkscreen extent -4.38,-2.45 0.68,2.45, body extent -4.15,-2.95 4.15,2.95, height 0.25
FP-LC-8-IPC_C [mm]
  rect 1.874x0.542 smd paste+0 mask+0: 1(-2.316,1.905)
  rrect100% 1.874x0.542 smd paste+0 mask+0: 2(-2.316,0.635) 3(-2.316,-0.635) 4(-2.316,-1.905) 5(2.316,-1.905) 6(2.316,-0.635) 7(2.316,0.635) 8(2.316,1.905)
  silkscreen extent -3.97,-2.45 0.88,2.45, body extent -3.35,-2.55 3.35,2.55, height 0.25
FP-LQW18AN_00-MFG [mm]
  rect 0.625x0.85 smd paste+0 mask+0: 1(-0.663,0) 2(0.663,0)
  silkscreen extent -0.9,-0.82 0.9,0.82, body extent -1.07,-0.6 1.07,0.6, height 0.25
FP-PFL1609-MFG [mm]
  rect 0.64x1.02 smd paste+0 mask+0: 1(-0.635,0) 2(0.635,0)
  silkscreen extent -0.9,-0.89 0.9,0.89, body extent -0.9,-0.54 0.9,0.54, height 0.95
FP-SMC-MFG [mm]
  rect 2.5x3.3 smd paste+0 mask+0: 1(-3.45,0) 2(3.45,0)
  silkscreen extent -4.25,-3.11 3.55,3.11, body extent -4.8,-3.21 4.8,3.21, height 0.25
FP-SOD-123-IPC_A [mm]
  rect 1.308x0.762 smd paste+0 mask+0: 1(-1.825,0)
  rrect100% 1.308x0.762 smd paste+0 mask+0: 2(1.825,0)
  silkscreen extent -2.39,-0.8 1.35,1.01, body extent -1.85,-0.8 1.85,0.8, height 1.35
FP-SOT323-3L-MFG [mm]
  rect 0.7x0.42 smd paste+0 mask+0: 1(-1,0.65) 2(-1,-0.65) 3(1,0)
  silkscreen extent -0.67,-1.1 0.67,1.1, body extent -1.05,-1 1.05,1, height 1.1
FP-SRF4532-MFG [mm]
  round 0.99 smd paste+0 mask+0: 1(-2.05,-1.25) 2(2.05,-1.25)
  round 0.97 smd paste+0 mask+0: 3(2.05,1.125) 4(-2.05,1.125)
  TOP region: -2.6,-1.8 -2.6,-0.45 -1.9,-0.45 -1.5,-0.95 -1.5,-1.8
  TOP region: 1.5,-1.8 1.5,-0.95 1.9,-0.45 2.6,-0.45 2.6,-1.8
  TOP region: 1.5,1.8 2.6,1.8 2.6,0.45 1.9,0.45 1.5,0.95
  TOP region: -2.6,0.45 -2.6,1.8 -1.5,1.8 -1.5,0.95 -1.9,0.45
  silkscreen extent -2.17,-2.47 1.12,1.7, body extent -2.25,-1.6 2.25,1.6, height 3
FP-SRR1260-MFG [mm]
  rect 2.9x5.4 smd paste+0 mask+0: 1(-4.85,0) 2(4.85,0)
  silkscreen extent -6.4,-6.4 6.4,6.4, body extent -6.5,-6.5 6.5,6.5, height 0.25
KEMT-T495-D_L [mm] "Molded Capacitor, 2-Leads, Body 7.6x4.6mm, IPC High Density"
  rect 2.2x2.35 smd: 1(-2.925,0) 2(2.925,0)
  silkscreen extent -4.52,-2.3 3.8,2.3, body extent -4.02,-2.3 4.02,2.3, height 3.1
KSTN-3001_V [mm] "THD, 2-Leads, Body 13.21x12.07mm"
  rect 2.35x2.35 hole 1.85: 1(-6.605,0)
  round 2.35 hole 1.85: 2(6.605,0)
  rect 3.96x3.96 smd: 3(0,0)
  silkscreen extent -8.45,-6.73 6.61,5.34, body extent -6.61,-6.73 6.61,5.34, height 3
KSTN-3557-2 [mm] "Fuse Holder, PCB Mount, Thru-Hole, Body 19.8x6.8mm, Height 7.4mm"
  round 2.15 hole 1.8: 1(-6.75,1.7) 2(-6.75,-1.7) 3(6.75,1.7) 4(6.75,-1.7)
  silkscreen extent -9.9,-3.4 9.9,4.12, body extent -9.91,-3.37 9.91,3.37, height 7.74
KTW0007B_N [mm] "DPAK, 7-Leads, Body 9.4x10.4mm, Pitch 1.27mm, IPC Medium Density"
  rrect11% 3.5x0.95 smd: 1(-6.3,3.81) 2(-6.3,2.54) 3(-6.3,1.27) 4(-6.3,0) 5(-6.3,-1.27) 6(-6.3,-2.54) 7(-6.3,-3.81)
  rrect1% 8.8x10.5 smd: 8(3.65,0)
  silkscreen extent -6.42,-5.2 -1.15,5.2, body extent -3.25,-5.2 6.15,5.2, height 4.65
MAX96724FGTN_V+-Footprint-1 [mm]
  oval 0.95x0.25 smd: 1(-3.875,3.25) 2(-3.875,2.75) 3(-3.875,2.25) 4(-3.875,1.75) 5(-3.875,1.25) 6(-3.875,0.75) 7(-3.875,0.25) 8(-3.875,-0.25) 9(-3.875,-0.75) 10(-3.875,-1.25) 11(-3.875,-1.75) 12(-3.875,-2.25) 13(-3.875,-2.75) 14(-3.875,-3.25) 29(3.875,-3.25) 30(3.875,-2.75) 31(3.875,-2.25) 32(3.875,-1.75) 33(3.875,-1.25) 34(3.875,-0.75) 35(3.875,-0.25) 36(3.875,0.25) 37(3.875,0.75) 38(3.875,1.25) 39(3.875,1.75) 40(3.875,2.25) 41(3.875,2.75) 42(3.875,3.25)
  oval 0.25x0.95 smd: 15(-3.25,-3.875) 16(-2.75,-3.875) 17(-2.25,-3.875) 18(-1.75,-3.875) 19(-1.25,-3.875) 20(-0.75,-3.875) 21(-0.25,-3.875) 22(0.25,-3.875) 23(0.75,-3.875) 24(1.25,-3.875) 25(1.75,-3.875) 26(2.25,-3.875) 27(2.75,-3.875) 28(3.25,-3.875) 43(3.25,3.875) 44(2.75,3.875) 45(2.25,3.875) 46(1.75,3.875) 47(1.25,3.875) 48(0.75,3.875) 49(0.25,3.875) 50(-0.25,3.875) 51(-0.75,3.875) 52(-1.25,3.875) 53(-1.75,3.875) 54(-2.25,3.875) 55(-2.75,3.875) 56(-3.25,3.875)
  rect 4.7x4.7 smd: 57(0,0)
  silkscreen extent -4.97,-4.2 4.2,4.2, body extent -4.05,-4.05 4.05,4.05, height 0.8